# Altium PCB CHESSOBC_rev1.PcbDoc (part 1 of 4)
Units mm, origin at the board's own origin, x right, y up, seen from the top; angles counter-clockwise.
Board outline 96.01 x 90.17 mm, 6 copper layers (Top Layer, +3.3V, Layer 2, Layer 3, GND, Bottom Layer), stack 0.816 mm thick; 143 components, 230 nets, 1063 pads, 572 vias.
Unrouted connection lines stored in the file: 5.
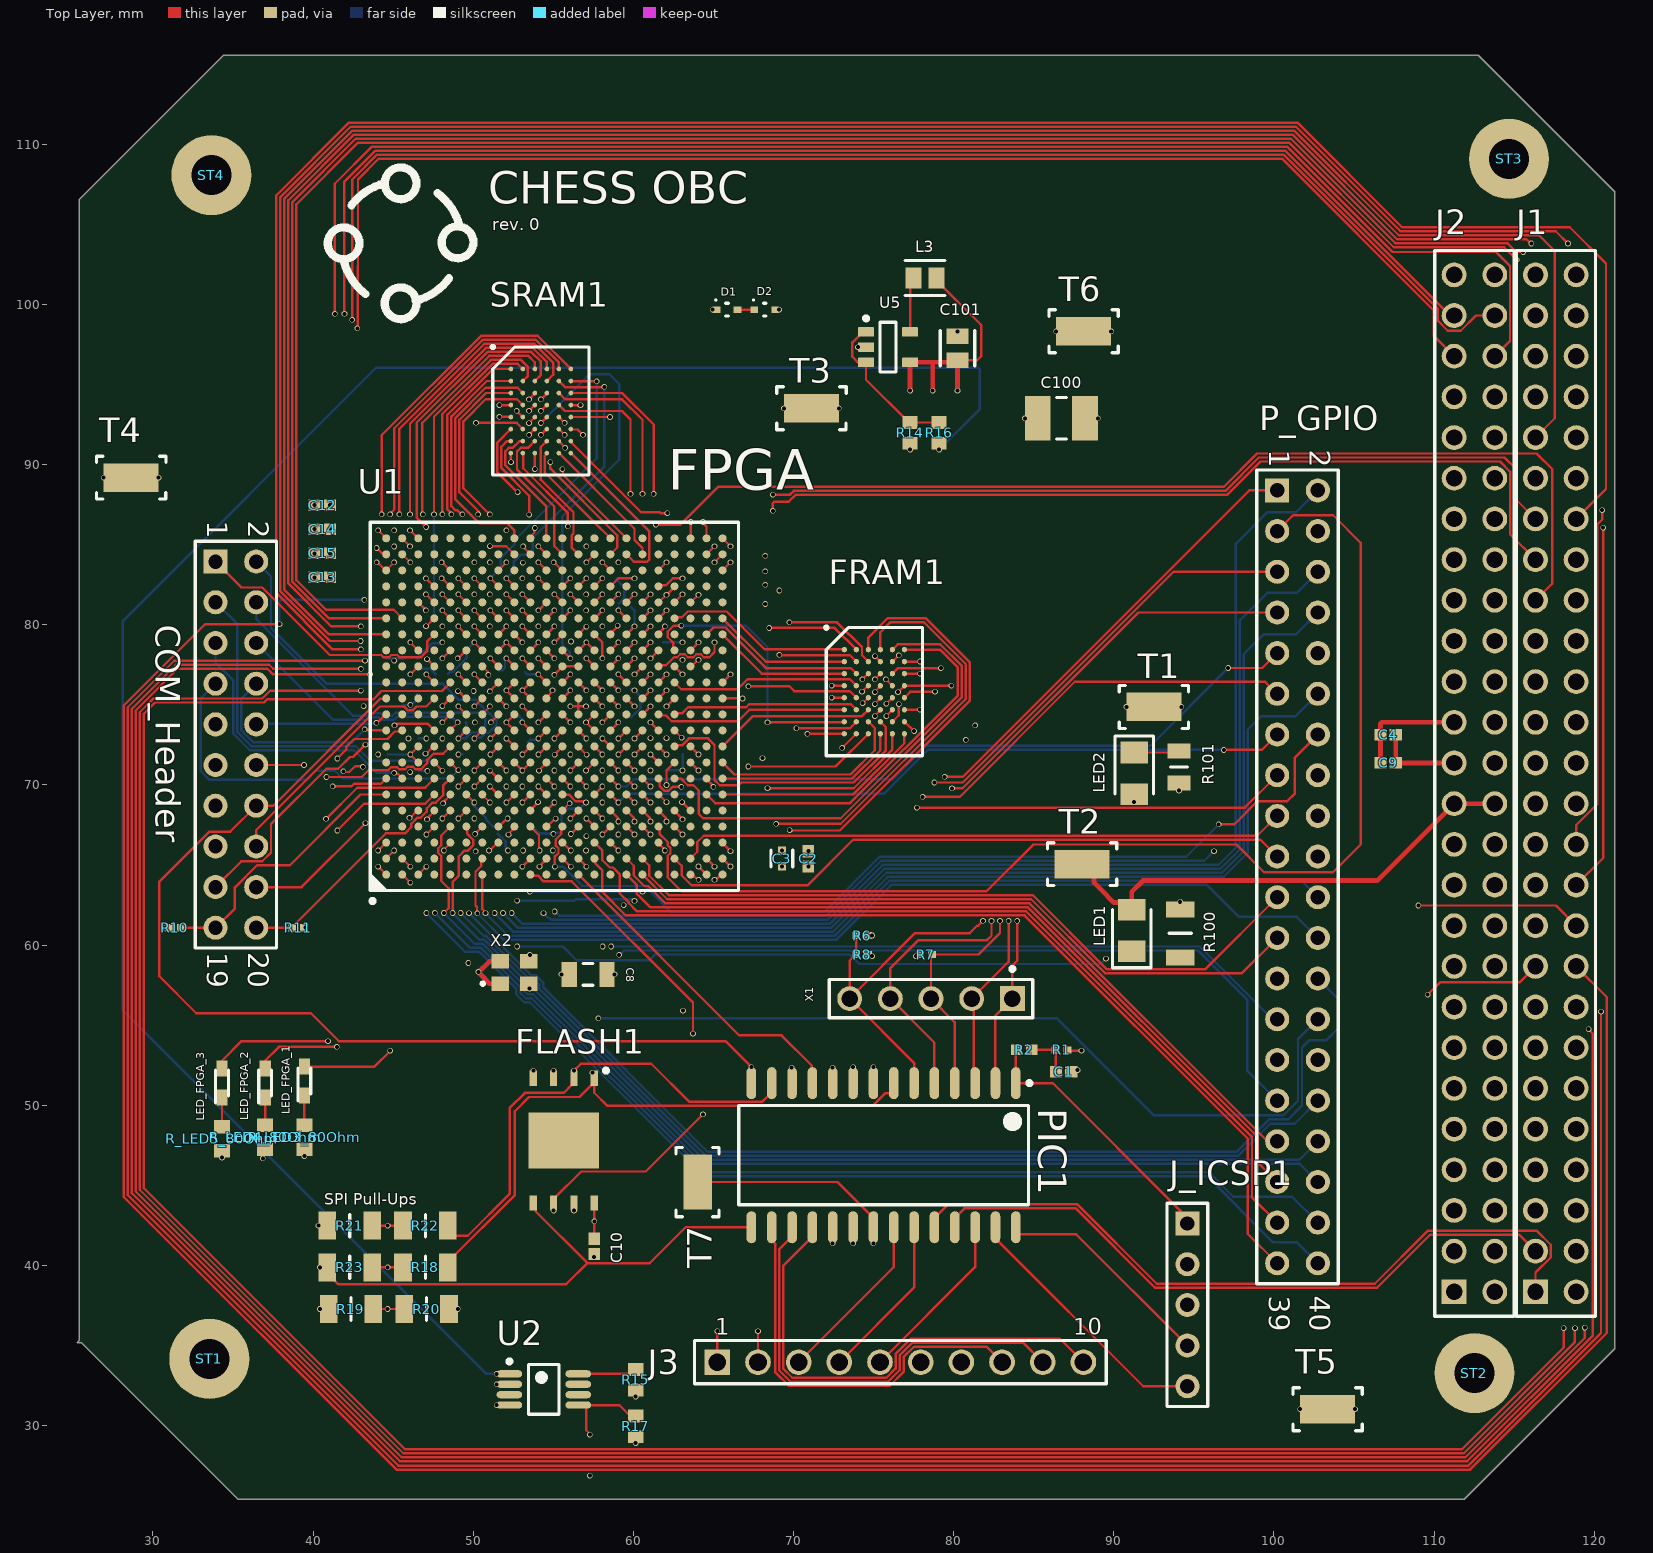
[diagram p0: Top Layer view]
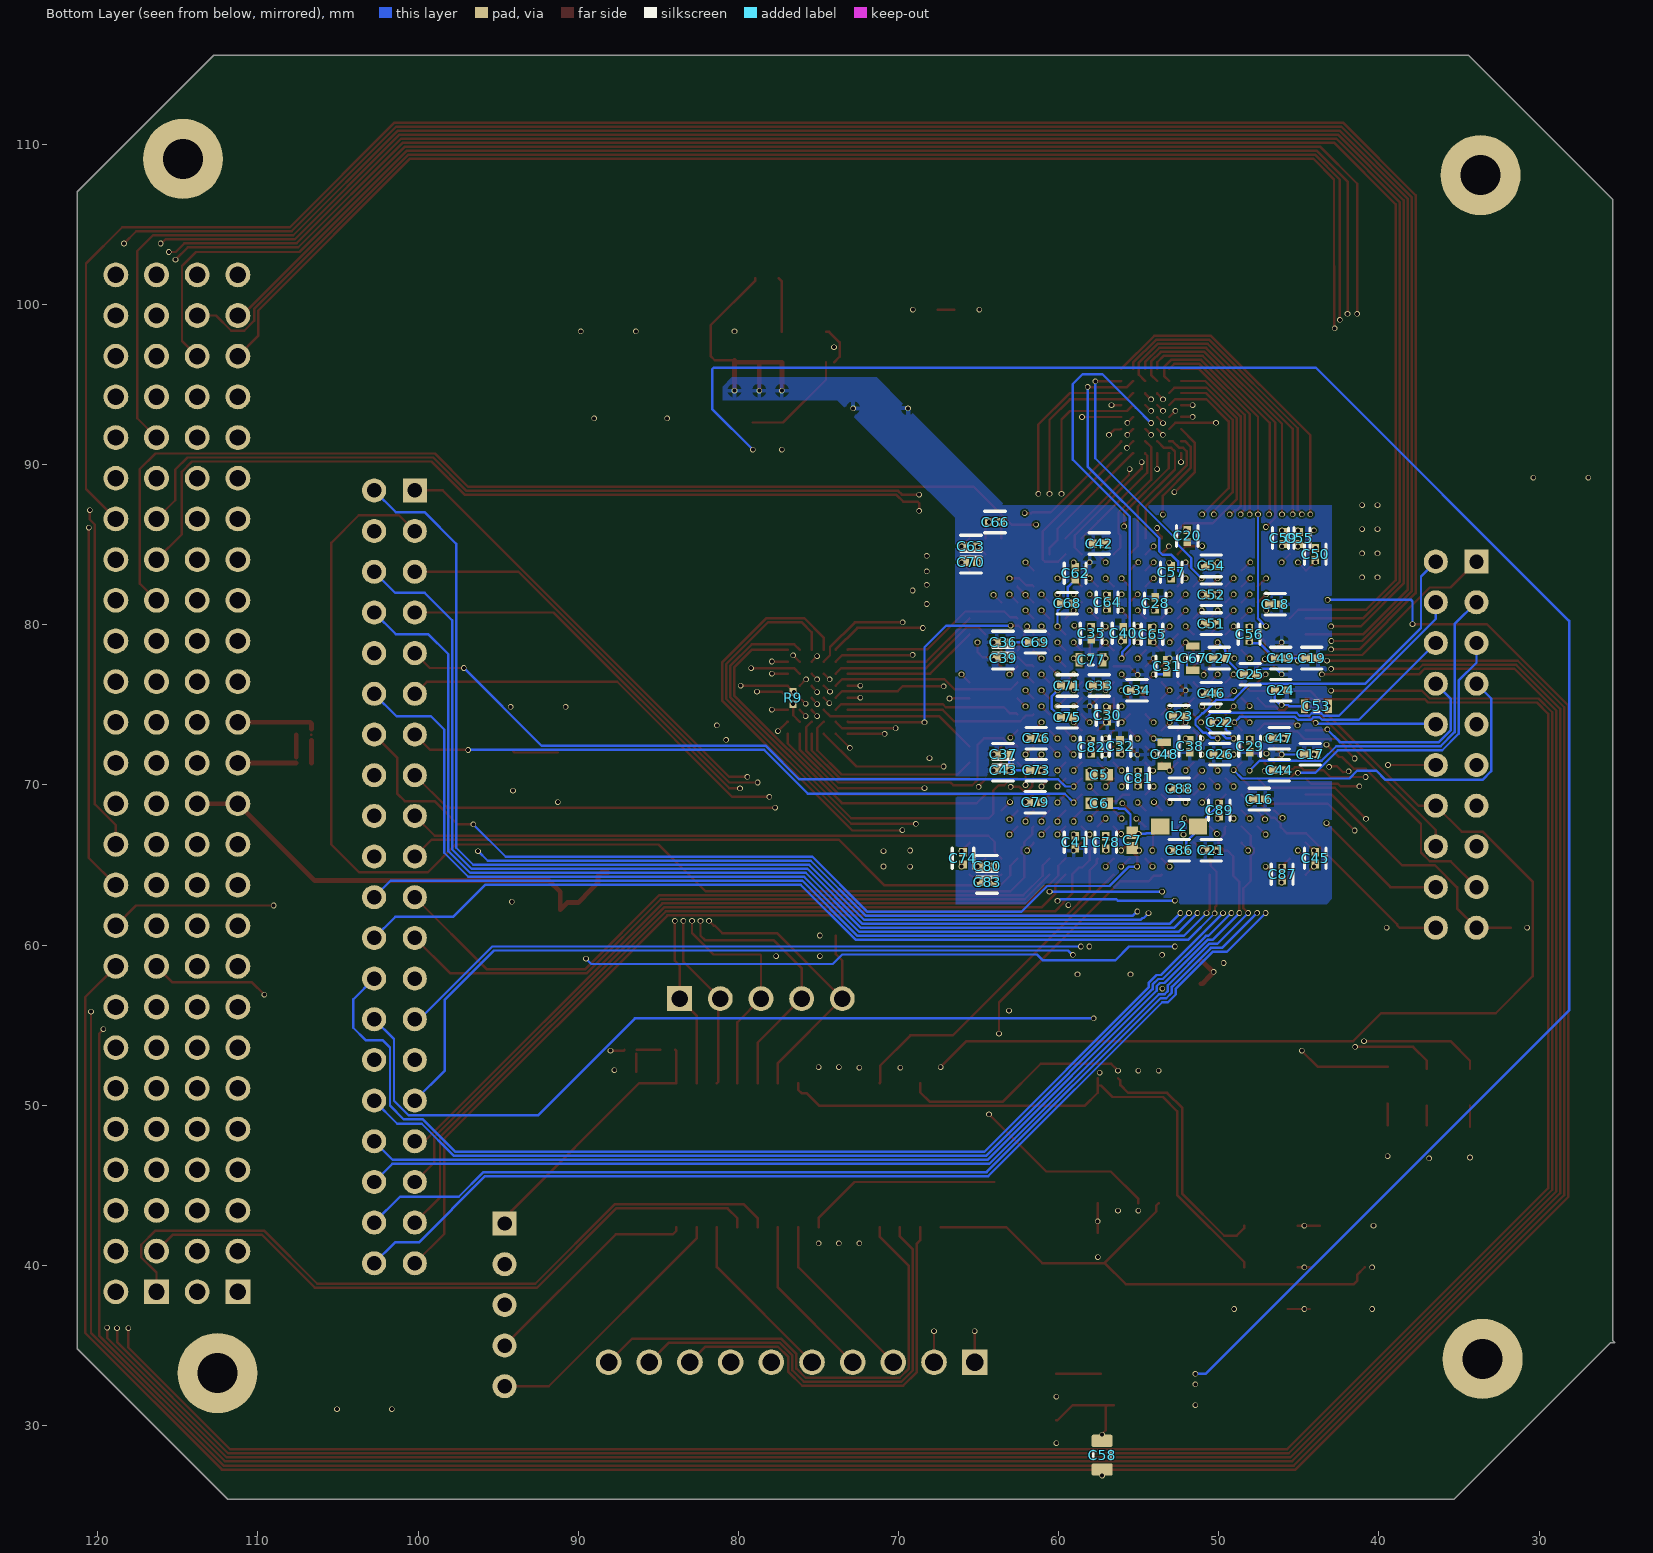
[diagram p1: Bottom Layer view, seen from below]
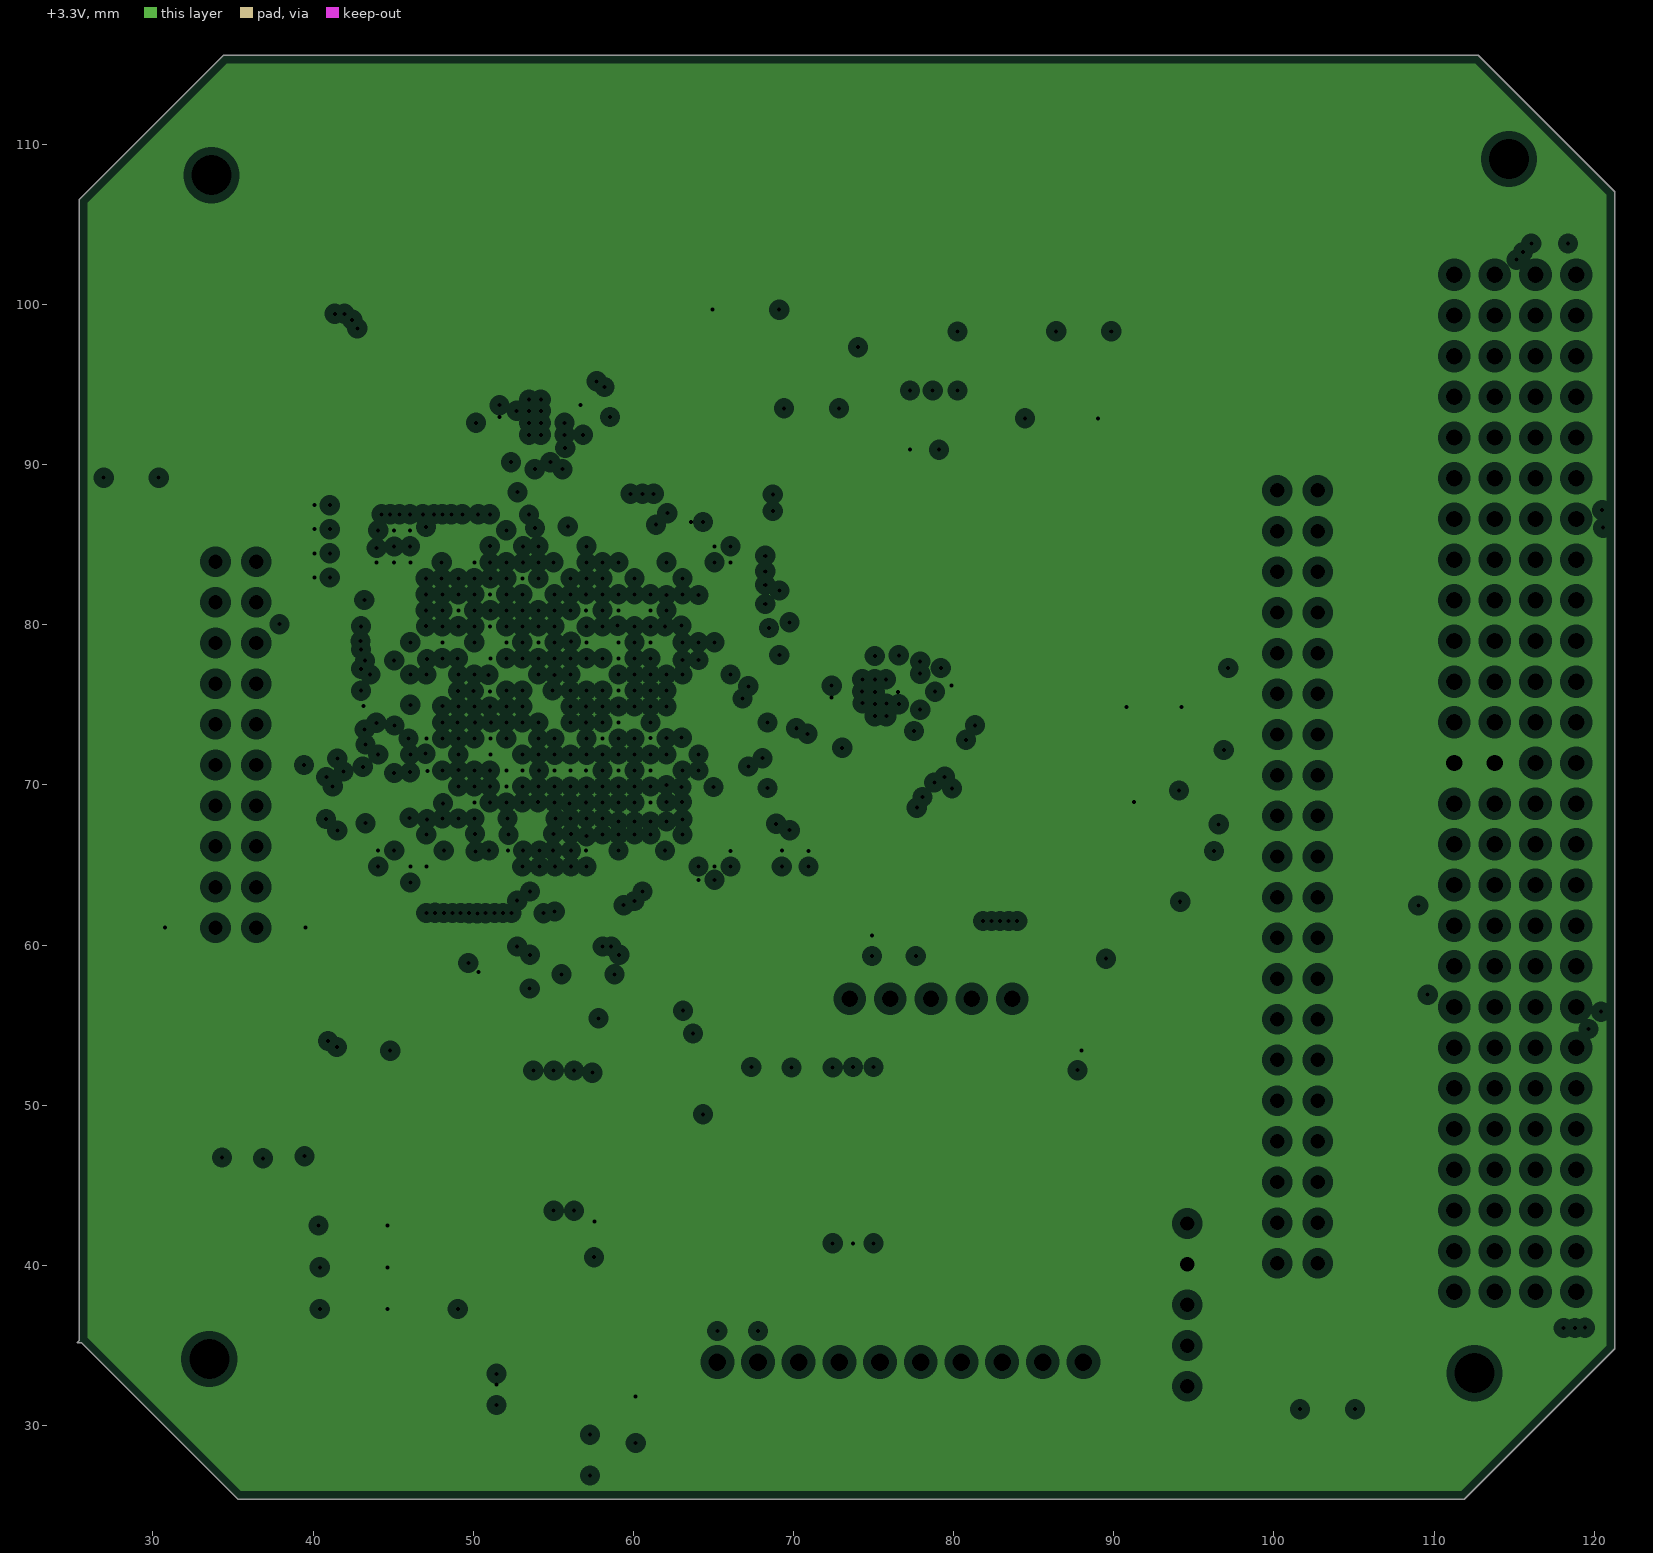
[diagram p2: +3.3V, clearances drawn from the general rule]
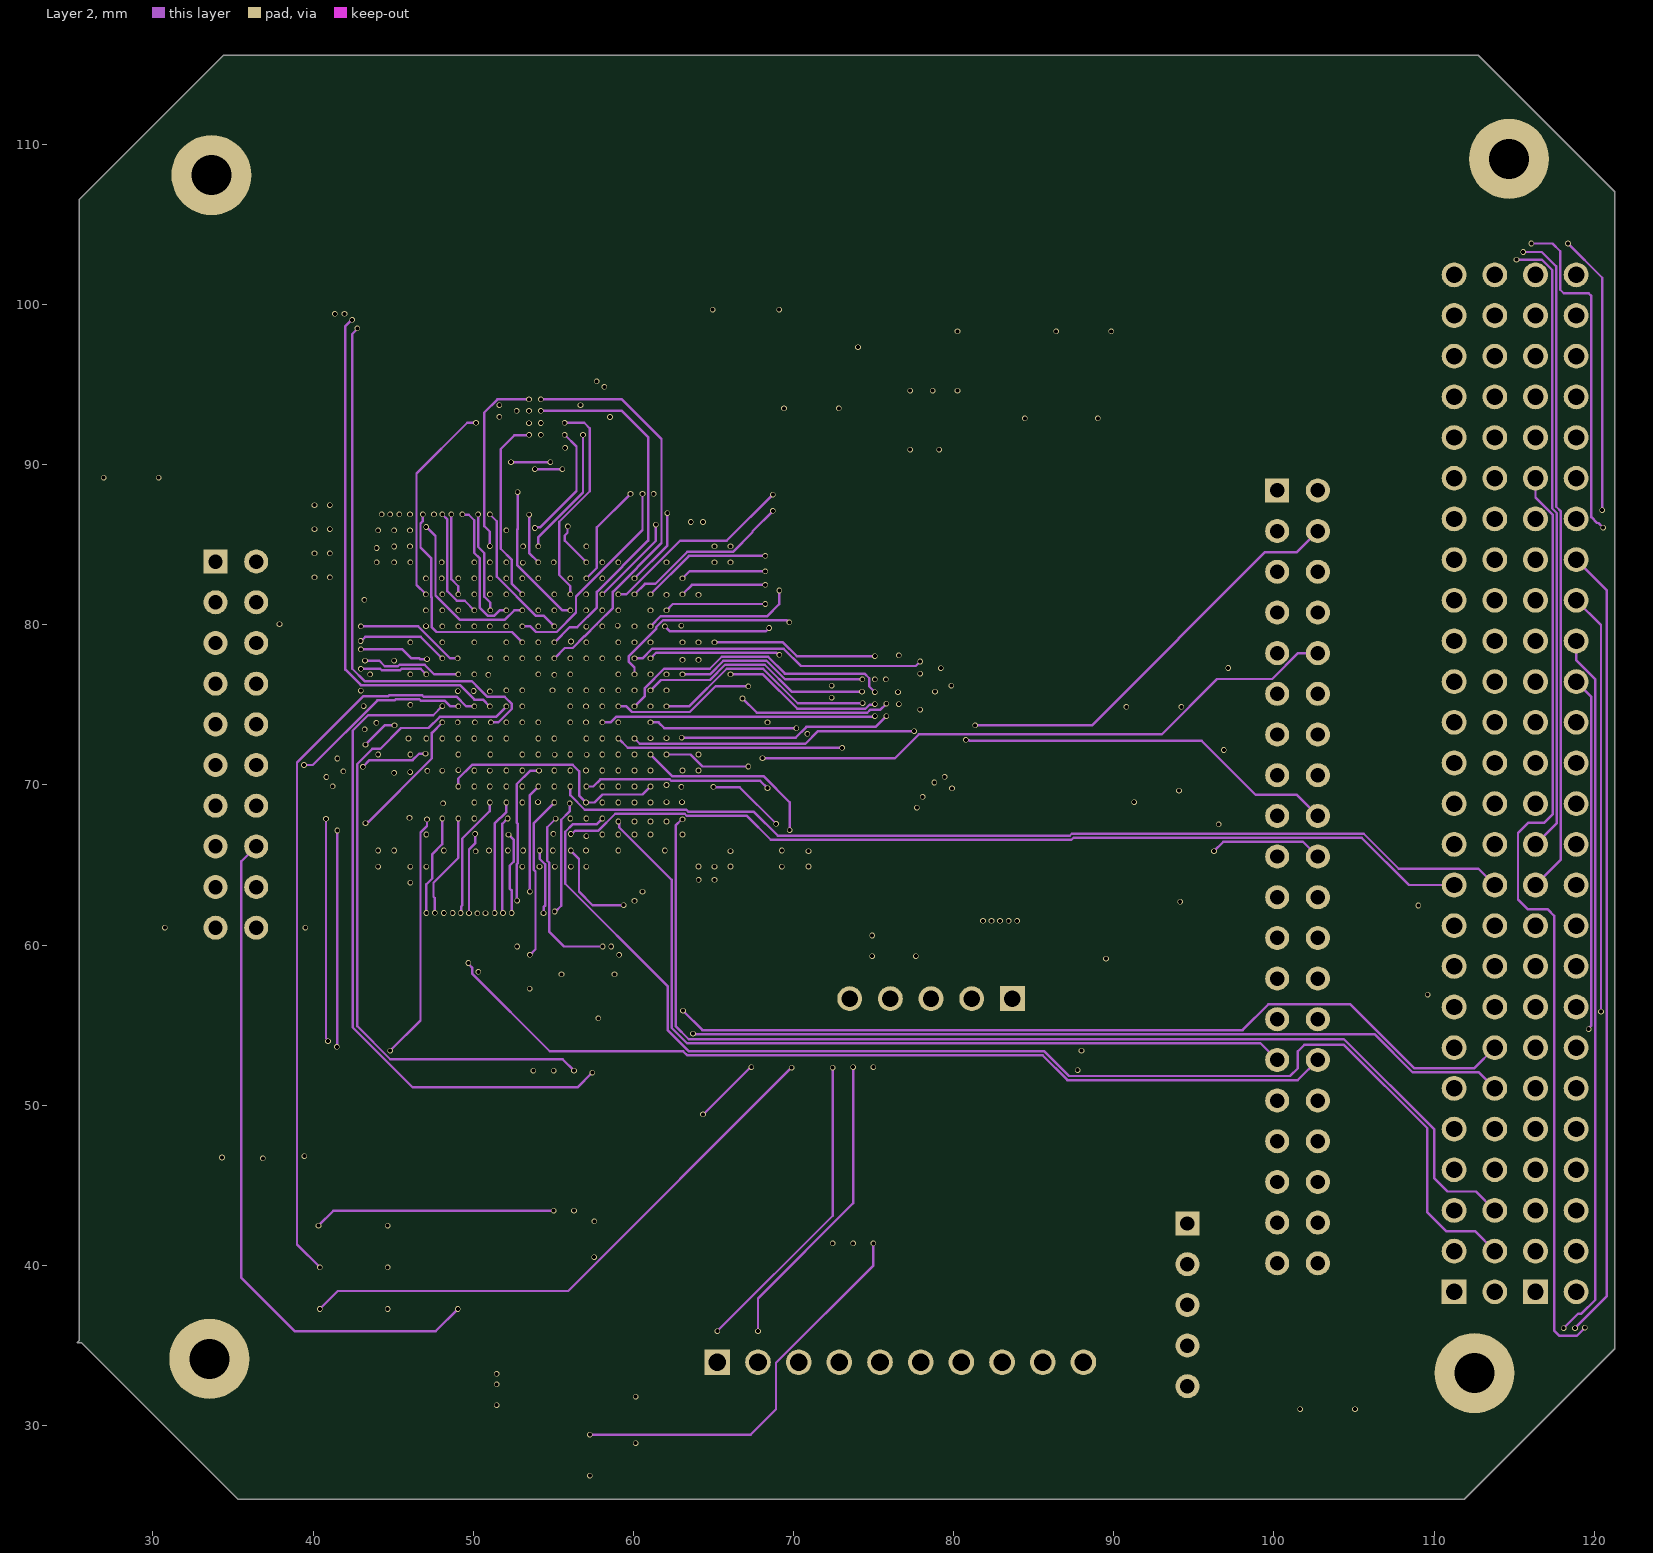
[diagram p3: Layer 2]
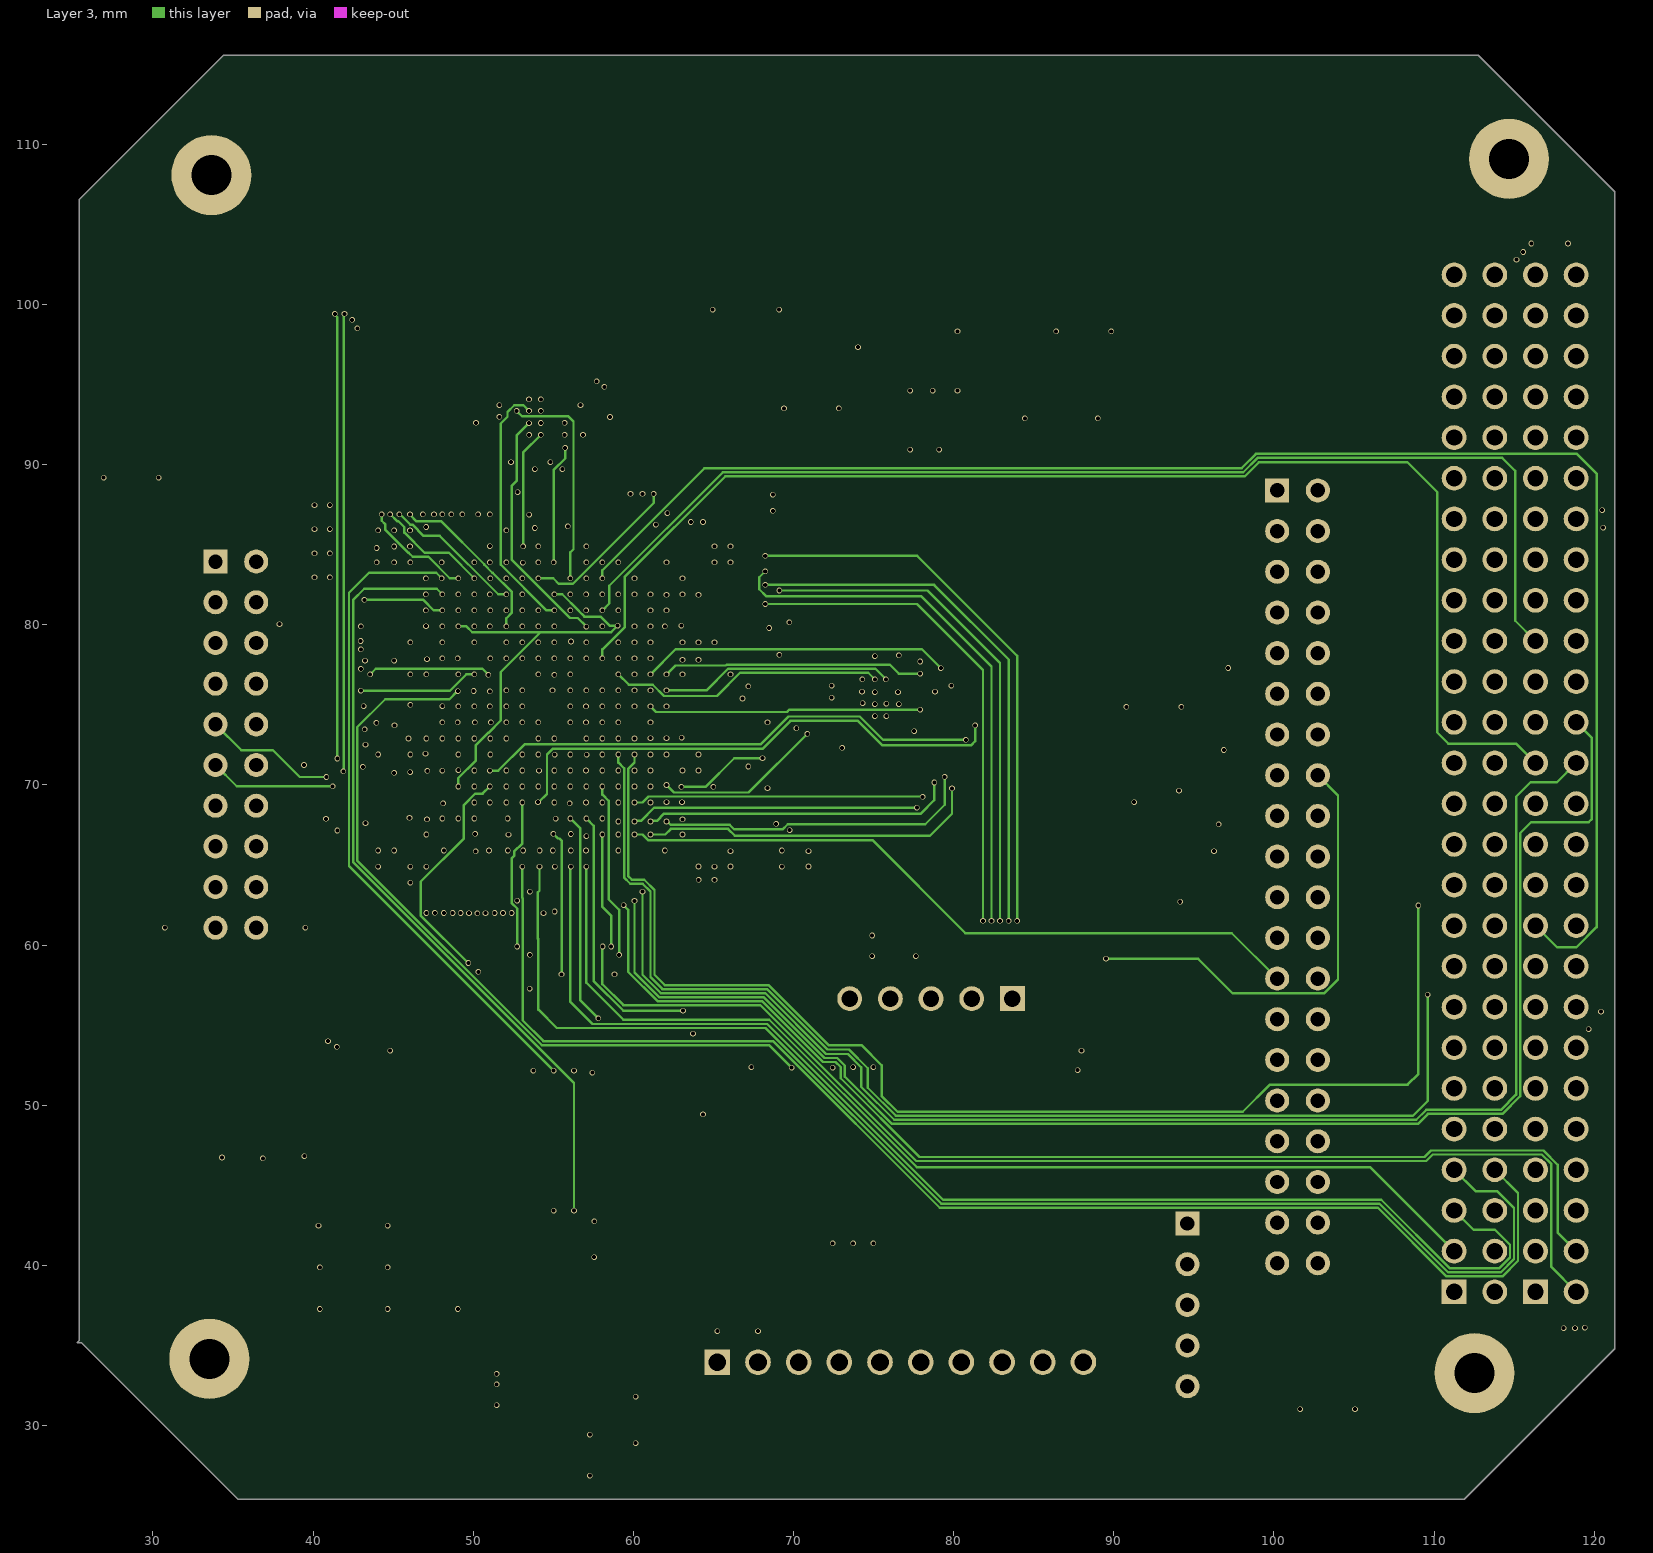
[diagram p4: Layer 3]
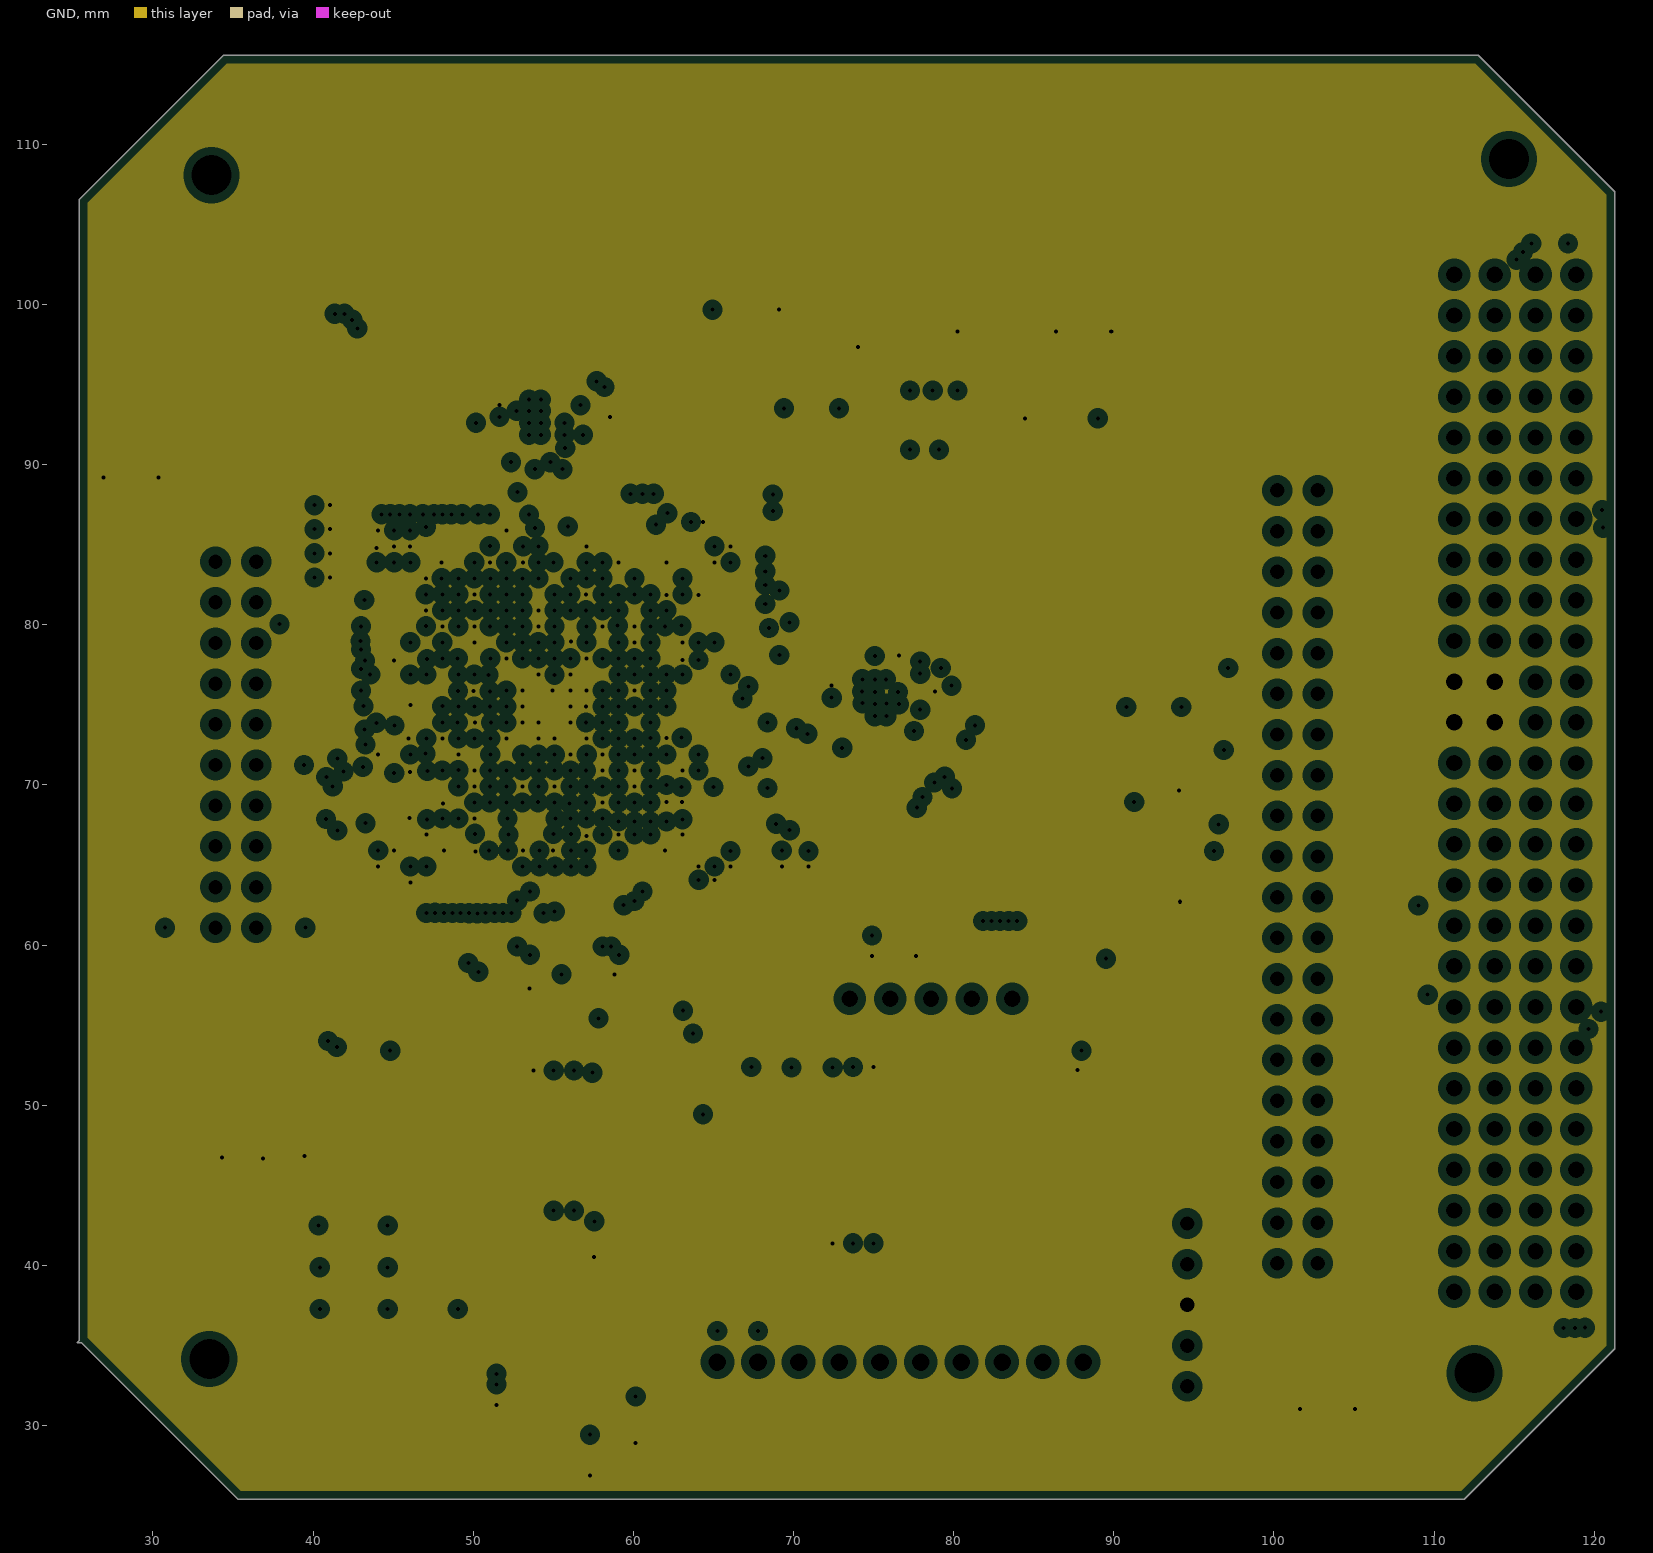
[diagram p5: GND, clearances drawn from the general rule]
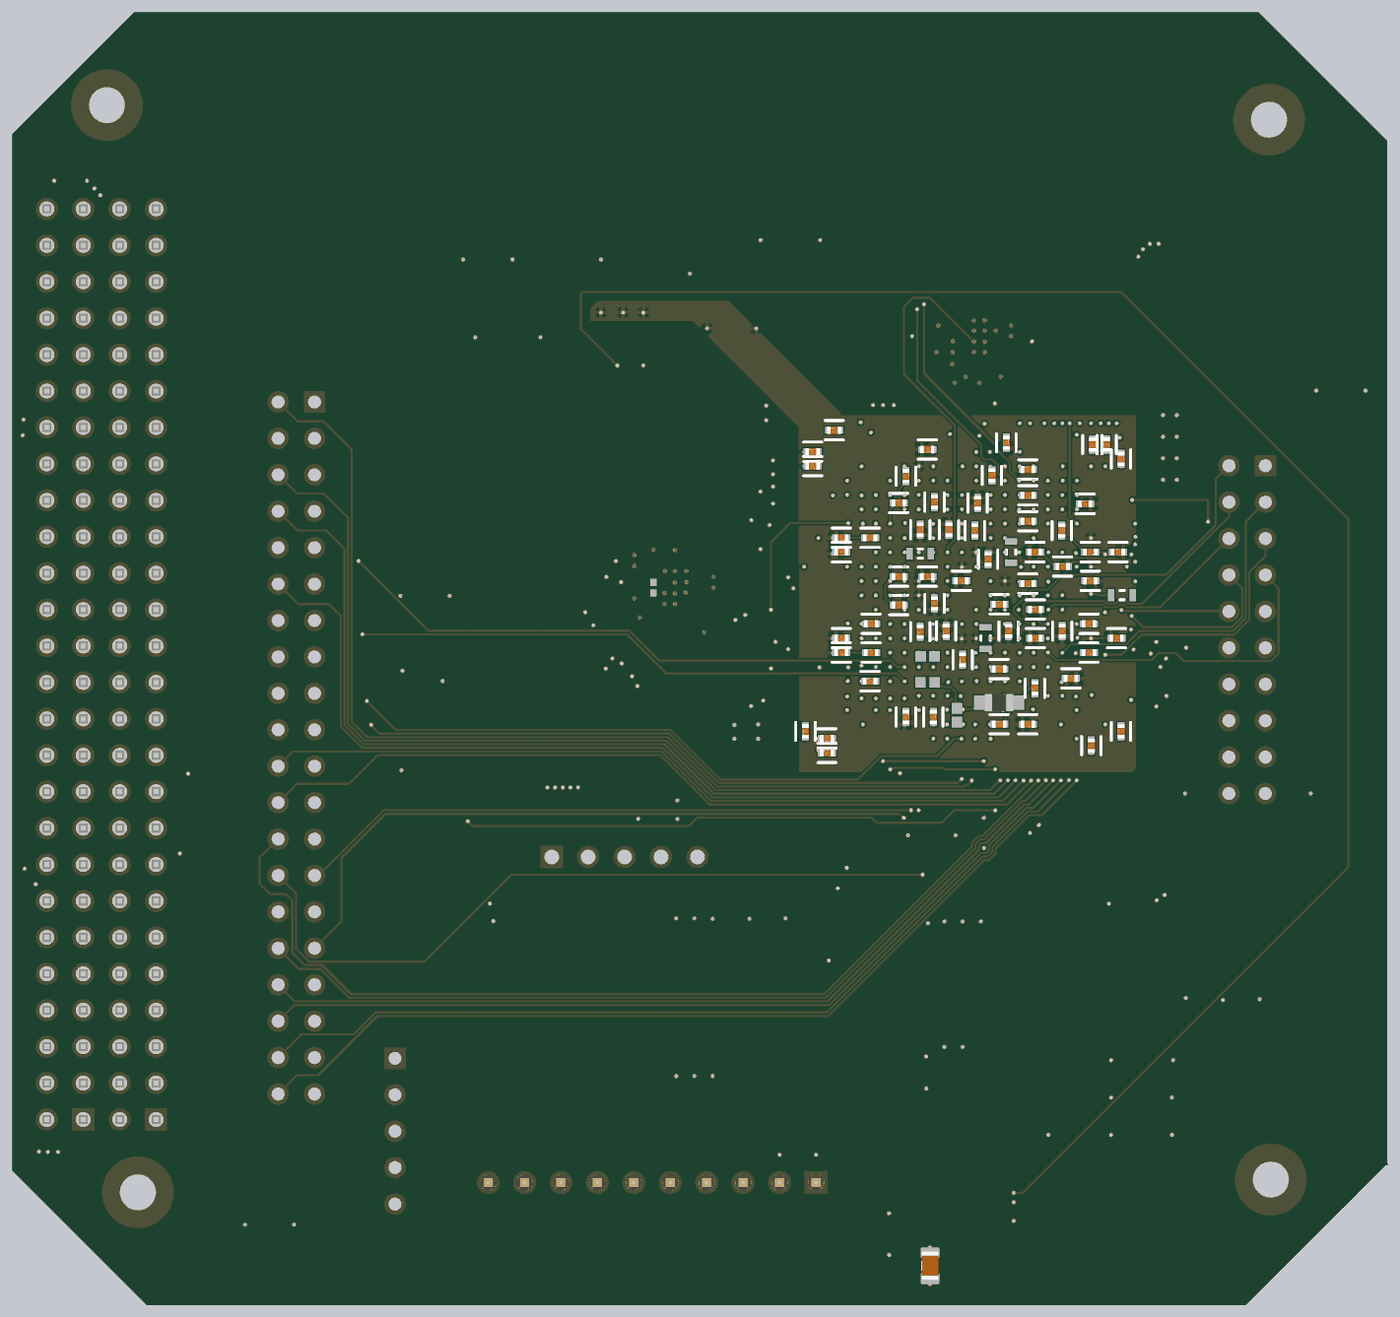
[diagram p8: 3D render of the assembled board from below, using the file's embedded part models]

## Layer stack, top to bottom
Top Solder: solder mask 0.0102, Solder Resist, Dk 3.5
Top Layer: signal copper 0.0356
Dielectric 2: prepreg 0.0711, PP-006, Dk 4.1
+3.3V: plane copper 0.035, net +3.3V
Dielectric 4: prepreg 0.0711, PP-006, Dk 4.1
Layer 2: signal copper 0.035
Dielectric 1: dielectric 0.32, FR-4, Dk 4.8
Layer 3: signal copper 0.035
Dielectric 5: prepreg 0.0711, PP-006, Dk 4.1
GND: plane copper 0.035, net GND
Dielectric 3: prepreg 0.0711, PP-006, Dk 4.1
Bottom Layer: signal copper 0.0356
Bottom Solder: solder mask 0.0102, Solder Resist, Dk 3.5

## Board outline
35.306,25.4 25.527,35.179 25.273,35.179 25.4,35.306 25.4,106.553 34.417,115.57 112.758,115.57 121.285,107.043 121.285,34.798 111.887,25.4

## Design rules (kind name [scope] priority, off if disabled: settings)
Clearance [All] p1: gap=0.1 ignorepadtopadclearanceinfootprint=TRUE except(0.075: SMDPad-SMDPad)
ComponentClearance ComponentClearance_PC [InComponent('J3') vs InComponent('J4')] p1: gap=0 collisioncheckmode=3 verticalgap=0.254 showdistances=FALSE
ComponentClearance ComponentClearance_pc104 [InComponent('J1') vs InComponent('J2')] p2: gap=0 collisioncheckmode=3 verticalgap=0 showdistances=FALSE
ComponentClearance [All] p3: gap=0.254 collisioncheckmode=3 verticalgap=0.254 showdistances=FALSE
MinimumSolderMaskSliver [All] p1: minsoldermaskwidth=0.15
PlaneClearance [All] p1: clearance=0.508
PlaneConnect PlaneConnect-FPGA [WithinRoom('FPGA')] p1: planeconnectstyle=Direct reliefexpansion=0.5 reliefentries=4 reliefconductorwidth=0.2 reliefairgap=0.2
PlaneConnect [All] p2: planeconnectstyle=Relief reliefexpansion=0.508 reliefentries=4 reliefconductorwidth=0.254 reliefairgap=0.254
PolygonConnect [All] p1: connectstyle=Relief reliefconductorwidth=0.254 reliefentries=4 polygonreliefangle="90 Angle" airgapwidth=0.254
RoomDefinition FRAM [False] p1: confinementstyle=ConfineIn formatcopy=TRUE lockcomponents=FALSE outline 70,82.5 80.25,82.5 80.25,69.75 70,69.75
RoomDefinition SRAM [False] p2: confinementstyle=ConfineIn formatcopy=TRUE lockcomponents=FALSE outline 50,98.75 58.5,98.75 58.5,88.25 50,88.25
RoomDefinition FPGA [False] p3: confinementstyle=ConfineIn formatcopy=TRUE lockcomponents=FALSE outline 42.5,87.75 68.214,87.75 68.214,62 42.5,62
RoutingVias RAM-Small-Vias [All] p1: holewidth=0.25 width=0.35 viastyle="Through Hole" minholewidth=0.25 minwidth=0.35 maxholewidth=0.25 maxwidth=0.35
SilkToSilkClearance [All] p1: silktosilkclearance=0
SilkToSolderMaskClearance [IsPad] p1: minsilkscreentomaskgap=0 clearancetoexposedcopper=TRUE
SolderMaskExpansion [All] p1: expansion=0 istentingtop=FALSE useseparateexpansions=TRUE expansionbottom=-5 istentingbottom=TRUE
Width [All] p1: maxlimit=0.3 minlimit=0.15 preferedwidth=0.15
24 further rules are at their usual default settings.

## Classes and differential pairs
component class GPIO_Headers: COM_Header LED3_FPGA LED4_FPGA LED5_FPGA LED_3V3 LED_5V P_GPIO R_LED3 R_LED3V3_180Ohm R_LED4 R_LED5 R_LED5V_75Ohm
component class FPGAPower: C3 C4 C5 C6 C7 C8 C16 C17 C18 C19 C20 C21 C22 C23 C24 C25 C26 C27 C28 C29 C30 C31 C32 C33 C34 C35 C36 C37 C38 C39 C40 C41 C42 C43 C44 C45 C46 C47 C48 C49 C50 C51 C52 C53 C54 C55 C56 C57 C59 C62 C63 C64 C65 C66 C67 C68 C69 C70 C71 C73 C74 C75 C76 C77 C78 C79 C80 C81 C82 C83 C86 C87 C88 C89 L2
component class FPGAMisc: C9 R6 R7 R8 X1 X2
component class FPGABanks: U1
component class Power: C58 C100 C101 D1 D2 L3 LED1 LED2 LED_FPGA_1 LED_FPGA_2 LED_FPGA_3 R14 R15 R16 R17 R100 R101 R_LED3_80Ohm R_LED4_80Ohm R_LED5_80Ohm ST1 ST2 ST3 ST4 T1 T2 T3 T4 T5 T6 T7 U2 U5
component class Interface: C1 C2 J1 J2 J3 J_ICSP1 PIC1 R1 R2 R3 R4 R10 R11 R18 R19 R20 R21 R22 R23
component class Memory: C10 C12 C13 C14 C15 FLASH1 FRAM1 J5 R9 Rcan S1 S4 SRAM1

## Components (designator, comment, footprint, x,y, rotation, side; value= is the part's Value field where it differs from the comment)
C1 "100nF" CAPC1005X60X30ML05T10 86.863,52.083 r180 top
C2 "100nF" CAPC1005X60X30ML05T10 70.934,65.388 r90 top
C3 "CC0402KRX5R6BB334" FP-CC0402-MFG 69.276,65.406 r270 top value="330 nF"
C4 "100nF" CAPC1005X60X30ML05T10 107.132,73.139 r0 top
C5 "100nF" CAPC1005X60X30ML05T10 57.474,70.649 r180 bottom
C6 "10nF" CAPC0402(1005)60_M 57.474,68.845 r180 bottom
C7 "100nF" CAPC1005X60X30ML05T10 55.405,66.541 r90 bottom
C8 "10uF" CAPC2013X145X20ML20 57.175,58.175 r180 top
C9 "100nF" CAPC1005X60X30ML05T10 107.132,71.374 r0 top
C10 "100nF" CAPC1005X60X30ML05T10 57.563,41.183 r90 top
C12 "100nF" CAPC1005X60X30ML05T10 40.569,87.474 r180 top
C13 "100nF" CAPC1005X60X30ML05T10 40.569,82.961 r180 top
C14 "100nF" CAPC1005X60X30ML05T10 40.569,85.97 r180 top
C15 "100nF" CAPC1005X60X30ML05T10 40.569,84.466 r180 top
C16 "10nF" FP-GRM155-0_05-IPC_C 47.474,69.116 r0 bottom
C17 "100nF" FP-GRM155-0_05-IPC_C 44.288,71.92 r180 bottom
C18 "10nF" FP-GRM155-0_05-IPC_C 46.474,81.286 r0 bottom
C19 "100nF" FP-GRM155-0_05-IPC_C 44.193,77.92 r0 bottom
C20 "10nF" FP-GRM155-0_05-IPC_C 51.974,85.548 r90 bottom
C21 "100nF" FP-GRM155-0_05-IPC_C 50.474,65.919 r180 bottom
C22 "10nF" FP-GRM155-0_05-IPC_C 49.946,73.92 r0 bottom
C23 "100nF" FP-GRM155-0_05-IPC_C 52.474,74.285 r0 bottom
C24 "10nF" FP-GRM155-0_05-IPC_C 46.12,75.92 r0 bottom
C25 "100nF" FP-GRM155-0_05-IPC_C 48.047,76.92 r0 bottom
C26 "10nF" FP-GRM155-0_05-IPC_C 49.946,71.92 r180 bottom
C27 "100nF" FP-GRM155-0_05-IPC_C 49.973,77.92 r180 bottom
C28 "10nF" FP-GRM155-0_05-IPC_C 53.973,81.347 r270 bottom
C29 "10nF" FP-GRM155-0_05-IPC_C 48.08,72.42 r90 bottom
C30 "10nF" FP-GRM155-0_05-IPC_C 56.974,74.347 r90 bottom
C31 "100nF" FP-GRM155-0_05-IPC_C 53.243,77.42 r270 bottom
C32 "10nF" FP-GRM155-0_05-IPC_C 56.17,72.42 r270 bottom
C33 "100nF" FP-GRM155-0_05-IPC_C 57.474,76.212 r180 bottom
C34 "10nF" FP-GRM155-0_05-IPC_C 55.108,75.92 r180 bottom
C35 "100nF" FP-GRM155-0_05-IPC_C 57.974,79.482 r90 bottom
C36 "10nF" FP-GRM155-0_05-IPC_C 63.474,78.92 r180 bottom
C37 "100nF" FP-GRM155-0_05-IPC_C 63.474,71.921 r180 bottom
C38 "10nF" FP-GRM155-0_05-IPC_C 51.811,72.42 r90 bottom
C39 "100nF" FP-GRM155-0_05-IPC_C 63.474,77.92 r180 bottom
C40 "10nF" FP-GRM155-0_05-IPC_C 55.974,79.482 r270 bottom
C41 "100nF" FP-GRM155-0_05-IPC_C 58.974,66.42 r90 bottom
C42 "10nF" FP-GRM155-0_05-IPC_C 57.474,85.078 r180 bottom
C43 "10nF" FP-GRM155-0_05-IPC_C 63.474,70.92 r180 bottom
C44 "10nF" FP-GRM155-0_05-IPC_C 46.215,70.92 r180 bottom
C45 "100nF" FP-GRM155-0_05-IPC_C 43.974,65.42 r270 bottom
C46 "10nF" FP-GRM155-0_05-IPC_C 50.474,75.724 r180 bottom
C47 "100nF" FP-GRM155-0_05-IPC_C 46.215,72.92 r180 bottom
C48 "1uF" CAPC1608X90X20LL10 53.415,71.92 r270 bottom
C49 "10nF" FP-GRM155-0_05-IPC_C 46.12,77.92 r180 bottom
C50 "100nF" FP-GRM155-0_05-IPC_C 43.974,84.42 r90 bottom
C51 "10nF" FP-GRM155-0_05-IPC_C 50.474,80.074 r180 bottom
C52 "100nF" FP-GRM155-0_05-IPC_C 50.474,81.879 r180 bottom
C53 "1uF" CAPC1608X90X20LL10 43.904,74.92 r180 bottom
C54 "100nF" FP-GRM155-0_05-IPC_C 50.474,83.683 r0 bottom
C55 "10nF" FP-GRM155-0_05-IPC_C 44.974,85.42 r270 bottom
C56 "100nF" FP-GRM155-0_05-IPC_C 48.108,79.42 r90 bottom
C57 "10nF" FP-GRM155-0_05-IPC_C 52.973,83.273 r90 bottom
C58 "Capacitor 22µF +/-40% 16V 0805" CAPC0805(2012)145_L 57.287,28.159 r90 bottom value=22µF
C59 "100nF" FP-GRM155-0_05-IPC_C 45.975,85.421 r270 bottom
C62 "10nF" FP-GRM155-0_05-IPC_C 58.973,83.213 r90 bottom
C63 "100nF" FP-GRM155-0_05-IPC_C 65.474,84.92 r0 bottom
C64 "10nF" FP-GRM155-0_05-IPC_C 56.974,81.409 r90 bottom
C65 "100nF" FP-GRM155-0_05-IPC_C 54.17,79.42 r90 bottom
C66 "10nF" FP-GRM155-0_05-IPC_C 63.973,86.42 r0 bottom
C67 "1uF" CAPC1608X90X20LL10 51.639,77.92 r90 bottom
C68 "10nF" FP-GRM155-0_05-IPC_C 59.474,81.347 r0 bottom
C69 "100nF" FP-GRM155-0_05-IPC_C 61.474,78.919 r0 bottom
C70 "10nF" FP-GRM155-0_05-IPC_C 65.474,83.92 r180 bottom
C71 "100nF" FP-GRM155-0_05-IPC_C 59.474,76.212 r0 bottom
C73 "10nF" FP-GRM155-0_05-IPC_C 61.401,70.92 r0 bottom
C74 "100nF" FP-GRM155-0_05-IPC_C 65.974,65.42 r270 bottom
C75 "10nF" FP-GRM155-0_05-IPC_C 59.474,74.23 r0 bottom
C76 "100nF" FP-GRM155-0_05-IPC_C 61.401,72.92 r0 bottom
C77 "1uF" CAPC1608X90X20LL10 57.974,77.816 r0 bottom
C78 "10nF" FP-GRM155-0_05-IPC_C 57.06,66.42 r90 bottom
C79 "10nF" FP-GRM155-0_05-IPC_C 61.474,68.92 r0 bottom
C80 "100nF" FP-GRM155-0_05-IPC_C 64.474,64.92 r180 bottom
C81 "10nF" FP-GRM155-0_05-IPC_C 55.02,70.42 r270 bottom
C82 "100nF" FP-GRM155-0_05-IPC_C 57.974,72.365 r270 bottom
C83 "10nF" FP-GRM155-0_05-IPC_C 64.474,63.92 r0 bottom
C86 "10nF" FP-GRM155-0_05-IPC_C 52.474,65.922 r0 bottom
C87 "100nF" FP-GRM155-0_05-IPC_C 46.05,64.425 r270 bottom
C88 "10nF" FP-GRM155-0_05-IPC_C 52.474,69.766 r0 bottom
C89 "100nF" FP-GRM155-0_05-IPC_C 49.973,68.419 r270 bottom
C100 "CAP 4.7uF 25V 1210(3225)" CAPC1210(3225)220_M 86.728,92.899 r0 top value=4.7uF
C101 "C0805C106K8PACTU" FP-C0805C-DG-MFG 80.24,97.273 r90 top value=10uF
COM_Header "Header 10X2" HDR2X10 33.909,83.947 r270 top
D1 "T3V3S5" ONSC-SOD-523-2-502-01_V 65.847,99.681 r0 top
D2 "T3V3S5" ONSC-SOD-523-2-502-01_V 68.207,99.681 r0 top
FLASH1 "TC58CVG0S3HRAIJ" SON127P800X600X80-9N-D 55.658,47.791 r270 top
FRAM1 "FM22LD16-55-BG" BGA48C75P6X8_600X800X120 75.051,75.825 r0 top locked
J1 "ESQ-126-23-T-D" SMTC-ESQ-126-23-X-D 116.332,38.354 r90 top
J2 "ESQ-126-23-T-D" SMTC-ESQ-126-23-X-D 111.252,38.354 r90 top
J3 "61301011121" 61301011121 76.674,33.959 r0 top
J_ICSP1 "" HDR1X5 94.596,42.617 r270 top
L2 "445-6761-2-ND 6.8uH" SMD-0805 52.474,67.42 r180 bottom
L3 "LQM21PN2R2NGCD" FP-LQM21PH_G0-IPC_C 78.214,101.656 r0 top
LED1 "RPG1102W-660-TR" LEDC3015X190N 91.125,60.911 r90 top
LED2 "RPG1102W-660-TR" LEDC3015X190N 91.275,70.731 r270 top
LED_FPGA_1 "SMLD12BN1WT86" LEDM168X65N 39.46,51.512 r90 top
LED_FPGA_2 "SMLD12BN1WT86" LEDM168X65N 37.009,51.383 r90 top
LED_FPGA_3 "SMLD12BN1WT86" LEDM168X65N 34.313,51.384 r90 top
P_GPIO "Header 20X2" HDR2X20 100.203,88.392 r270 top
PIC1 "PIC18F2520-I/SO" SOIC-SO28_L 75.626,46.883 r270 top
R1 "10k" RESC1005X40X25LL05T10 86.738,53.459 r0 top
R2 "220R" RESC1005X40X25ML05T10 84.409,53.459 r180 top
R6 "NC" RESC1005X40X25LL05T10 74.284,60.599 r0 top
R7 "10k" RESC1005X40X25LL05T10 78.262,59.413 r0 top
R8 "4k7" RESC1005X40X25LL05T10 74.284,59.413 r180 top
R9 "10k" RESC1005X40X25LL05T10 76.581,75.438 r90 bottom
R10 "10k" RESC1005X40X25LL05T10 31.377,61.087 r180 top
R11 "10k" RESC1005X40X25LL05T10 39.069,61.087 r0 top
R14 "CRCW06030000Z0EA" RESC1609X50X30NL8T20 77.281,91.984 r90 top
R15 "CRCW06030000Z0EA" RESC1609X50X30NL8T20 60.149,32.86 r90 top
R16 "CRCW06030000Z0EA" RESC1609X50X30NL8T20 79.09,91.984 r270 top
R17 "CRCW06030000Z0EA" RESC1609X50X30NL8T20 60.149,29.956 r90 top
R18 "CHP1206AFX-4701ELF" RESC3116X65N#1 47.014,39.883 r180 top
R19 "CHP1206AFX-4701ELF" RESC3116X65N#1 42.369,37.279 r0 top
R20 "CHP1206AFX-4701ELF" RESC3116X65N#1 47.091,37.279 r180 top
R21 "CHP1206AFX-4701ELF" RESC3116X65N#1 42.291,42.487 r0 top
R22 "CHP1206AFX-4701ELF" RESC3116X65N#1 47.014,42.487 r180 top
R23 "CHP1206AFX-4701ELF" RESC3116X65N#1 42.291,39.883 r0 top
R100 "RC1206JR-07180RL" RESC3116X65N#2 94.15,60.739 r90 top
R101 "RN73H2ATTD75R0B25" RESC2012X60N 94.075,71.125 r270 top
R_LED3_80Ohm "RCS060382R0FKEA" RESC1608X50N 39.46,47.998 r270 top
R_LED4_80Ohm "RCS060382R0FKEA" RESC1608X50N 37.009,48.004 r270 top
R_LED5_80Ohm "RCS060382R0FKEA" RESC1608X50N 34.313,47.917 r270 top
SRAM1 "CY62167GE30-45BV1XI" BGA48C75P6X8_600X800X100 54.223,93.351 r0 top locked
ST1 "PTH-M2D5X5" PTH-M2D5X5 33.528,34.163 r0 top
ST2 "PTH-M2D5X5" PTH-M2D5X5 112.522,33.274 r0 top
ST3 "PTH-M2D5X5" PTH-M2D5X5 114.681,109.093 r0 top
ST4 "PTH-M2D5X5" PTH-M2D5X5 33.655,108.077 r0 top
T1 "5015" FP-5015-MFG 92.5,74.875 r0 top
T2 "5015" FP-5015-MFG 88.02,65.055 r0 top
T3 "5015" FP-5015-MFG 71.123,93.524 r0 top
T4 "5015" FP-5015-MFG 28.644,89.189 r0 top
T5 "5015" FP-5015-MFG 103.347,31.02 r0 top
T6 "5015" FP-5015-MFG 88.116,98.33 r0 top
T7 "5015" FP-5015-MFG 64.008,45.207 r90 top
U1 "M1A3P600-FG484" FG484 55.07,74.906 r90 top locked
U2 "LT6105IMS8#PBF" LT-MS8-8_N 54.411,32.255 r0 top
U5 "LM3671MF-3.3/NOPB" DBV0005A_N 75.906,97.341 r0 top
X1 "77311-462K05LF" FCI-77311-5_V 78.589,56.661 r180 top
X2 "ECS-2033-320-AU" OSC_ECS-2033-320-AU 52.578,58.293 r0 top

## Footprints (in the part's own frame and the unit in brackets; to place one, negate y for a bottom-side part, rotate by r counter-clockwise, add the part's x,y. Pads: shape width x height; smd on the part's side, far side on the other; paste and mask are expansions set on the pad)
61301011121 [mm] "Pin Header, pitch 2.54 mm, THT, Vertical, single row, 10p"
  rect 1.6x1.6 hole 1.1: 1(-11.43,0)
  round 1.6 hole 1.1: 2(-8.89,0) 3(-6.35,0) 4(-3.81,0) 5(-1.27,0) 6(1.27,0) 7(3.81,0) 8(6.35,0) 9(8.89,0) 10(11.43,0)
  silkscreen extent -12.85,-1.34 12.85,1.34, body extent -12.7,-1.27 12.7,1.27, height 8.57
BGA48C75P6X8_600X800X100 [mm]
  round 0.29 smd: A1(-1.875,2.625) A2(-1.125,2.625) A3(-0.375,2.625) A4(0.375,2.625) A5(1.125,2.625) A6(1.875,2.625) B1(-1.875,1.875) B2(-1.125,1.875) B3(-0.375,1.875) B4(0.375,1.875) B5(1.125,1.875) B6(1.875,1.875) C1(-1.875,1.125) C2(-1.125,1.125) C3(-0.375,1.125) C4(0.375,1.125) C5(1.125,1.125) C6(1.875,1.125) D1(-1.875,0.375) D2(-1.125,0.375) D3(-0.375,0.375) D4(0.375,0.375) D5(1.125,0.375) D6(1.875,0.375) E1(-1.875,-0.375) E2(-1.125,-0.375) E3(-0.375,-0.375) E4(0.375,-0.375) E5(1.125,-0.375) E6(1.875,-0.375) F1(-1.875,-1.125) F2(-1.125,-1.125) F3(-0.375,-1.125) F4(0.375,-1.125) F5(1.125,-1.125) F6(1.875,-1.125) G1(-1.875,-1.875) G2(-1.125,-1.875) G3(-0.375,-1.875) G4(0.375,-1.875) G5(1.125,-1.875) G6(1.875,-1.875) H1(-1.875,-2.625) H2(-1.125,-2.625) H3(-0.375,-2.625) H4(0.375,-2.625) H5(1.125,-2.625) H6(1.875,-2.625)
  silkscreen extent -3.1,-4 3,4.1, body extent -3,-4 3,4, height 1
BGA48C75P6X8_600X800X120 [mm]
  round 0.33 smd: A1(-1.875,2.625) A2(-1.125,2.625) A3(-0.375,2.625) A4(0.375,2.625) A5(1.125,2.625) A6(1.875,2.625) B1(-1.875,1.875) B2(-1.125,1.875) B3(-0.375,1.875) B4(0.375,1.875) B5(1.125,1.875) B6(1.875,1.875) C1(-1.875,1.125) C2(-1.125,1.125) C3(-0.375,1.125) C4(0.375,1.125) C5(1.125,1.125) C6(1.875,1.125) D1(-1.875,0.375) D2(-1.125,0.375) D3(-0.375,0.375) D4(0.375,0.375) D5(1.125,0.375) D6(1.875,0.375) E1(-1.875,-0.375) E2(-1.125,-0.375) E3(-0.375,-0.375) E4(0.375,-0.375) E5(1.125,-0.375) E6(1.875,-0.375) F1(-1.875,-1.125) F2(-1.125,-1.125) F3(-0.375,-1.125) F4(0.375,-1.125) F5(1.125,-1.125) F6(1.875,-1.125) G1(-1.875,-1.875) G2(-1.125,-1.875) G3(-0.375,-1.875) G4(0.375,-1.875) G5(1.125,-1.875) G6(1.875,-1.875) H1(-1.875,-2.625) H2(-1.125,-2.625) H3(-0.375,-2.625) H4(0.375,-2.625) H5(1.125,-2.625) H6(1.875,-2.625)
  silkscreen extent -3.1,-4 3,4.1, body extent -3,-4 3,4, height 1.2
CAPC0402(1005)60_M [mm] "Chip Capacitor, Body 1.0x0.5mm, Height 0.6mm, IPC Low Density"
  rect 0.72x0.72 smd: 1(-0.5,0) 2(0.5,0)
  body extent -0.55,-0.3 0.55,0.3, height 0.6
CAPC0805(2012)145_L [mm] "Chip Capacitor, Body 2.0x1.2mm, Height 1.45mm, IPC High Density"
  rrect25% 0.76x1.3 smd: 1(-0.9,0) 2(0.89,0)
  silkscreen extent -0.3,-0.55 0.3,0.55, body extent -1,-0.6 1,0.6, height 1.45
CAPC1005X60X30ML05T10 [mm] "Chip Capacitor, 2-Leads, Body 1.00x0.50mm, IPC Low Density"
  rect 0.76x0.72 smd: 1(-0.48,0) 2(0.48,0)
  body extent -0.53,-0.28 0.53,0.27, height 0.6
CAPC1210(3225)220_M [mm] "Chip Capacitor, Body 3.2x2.5mm, Height 2.2mm, IPC Low Density"
  rect 1.6x2.8 smd: 1(-1.475,0) 2(1.475,0)
  silkscreen extent -0.3,-1.3 0.3,1.3, body extent -1.7,-1.35 1.7,1.35, height 2.2
CAPC1608X90X20LL10 [mm] "Chip Capacitor, 2-Leads, Body 1.70x0.90mm, IPC High Density"
  rect 0.45x0.85 smd: 1(-0.75,0) 2(0.75,0)
  silkscreen extent -0.15,-0.33 0.15,0.32, body extent -0.85,-0.45 0.85,0.45, height 0.9
CAPC2013X145X20ML20 [mm] "Chip Capacitor, 2-Leads, Body 2.20x1.45mm, IPC Low Density"
  rect 0.95x1.55 smd: 1(-1.175,0) 2(1.175,0)
  silkscreen extent -0.3,-0.67 0.3,0.67, body extent -1.1,-0.72 1.1,0.72, height 1.45
DBV0005A_N [mm] "SOT23, 5-Leads, Body 3.05x1.75mm, Pitch 0.95mm, IPC Medium Density"
  rrect17% 1x0.6 smd: 1(-1.375,0.95) 2(-1.375,0) 3(-1.375,-0.95) 4(1.375,-0.95) 5(1.375,0.95)
  silkscreen extent -1.5,-1.55 0.5,1.92, body extent -1.42,-1.46 1.42,1.46, height 1.08
FCI-77311-5_V [mm] "THD, 5-Leads, Body 12.7x2.4mm, Pitch 2.54mm"
  rect 1.55x1.55 hole 1.02: 1(-5.08,0)
  round 1.55 hole 1.02: 2(-2.54,0) 3(0,0) 4(2.54,0) 5(5.08,0)
  silkscreen extent -6.35,-1.97 6.35,1.2, body extent -6.35,-1.2 6.35,1.2, height 16.24
FG484 [mm] "BGA, 484-Leads, Body 23x23mm, Pitch 1mm"
  round 0.5 smd: A1(-10.5,10.5) A2(-9.5,10.5) A3(-8.5,10.5) A4(-7.5,10.5) A5(-6.5,10.5) A6(-5.5,10.5) A7(-4.5,10.5) A8(-3.5,10.5) A9(-2.5,10.5) A10(-1.5,10.5) A11(-0.5,10.5) A12(0.5,10.5) A13(1.5,10.5) A14(2.5,10.5) A15(3.5,10.5) A16(4.5,10.5) A17(5.5,10.5) A18(6.5,10.5) A19(7.5,10.5) A20(8.5,10.5) A21(9.5,10.5) A22(10.5,10.5) AA1(-10.5,-9.5) AA2(-9.5,-9.5) AA3(-8.5,-9.5) AA4(-7.5,-9.5) AA5(-6.5,-9.5) AA6(-5.5,-9.5) AA7(-4.5,-9.5) AA8(-3.5,-9.5) AA9(-2.5,-9.5) AA10(-1.5,-9.5) AA11(-0.5,-9.5) AA12(0.5,-9.5) AA13(1.5,-9.5) AA14(2.5,-9.5) AA15(3.5,-9.5) AA16(4.5,-9.5) AA17(5.5,-9.5) AA18(6.5,-9.5) AA19(7.5,-9.5) AA20(8.5,-9.5) AA21(9.5,-9.5) AA22(10.5,-9.5) AB1(-10.5,-10.5) AB2(-9.5,-10.5) AB3(-8.5,-10.5) AB4(-7.5,-10.5) AB5(-6.5,-10.5) AB6(-5.5,-10.5) AB7(-4.5,-10.5) AB8(-3.5,-10.5) AB9(-2.5,-10.5) AB10(-1.5,-10.5) AB11(-0.5,-10.5) AB12(0.5,-10.5) AB13(1.5,-10.5) AB14(2.5,-10.5) AB15(3.5,-10.5) AB16(4.5,-10.5) AB17(5.5,-10.5) AB18(6.5,-10.5) AB19(7.5,-10.5) AB20(8.5,-10.5) AB21(9.5,-10.5) AB22(10.5,-10.5) B1(-10.5,9.5) B2(-9.5,9.5) B3(-8.5,9.5) B4(-7.5,9.5) B5(-6.5,9.5) B6(-5.5,9.5) B7(-4.5,9.5) B8(-3.5,9.5) B9(-2.5,9.5) B10(-1.5,9.5) B11(-0.5,9.5) B12(0.5,9.5) B13(1.5,9.5) B14(2.5,9.5) B15(3.5,9.5) B16(4.5,9.5) B17(5.5,9.5) B18(6.5,9.5) B19(7.5,9.5) B20(8.5,9.5) B21(9.5,9.5) B22(10.5,9.5) C1(-10.5,8.5) C2(-9.5,8.5) C3(-8.5,8.5) C4(-7.5,8.5) C5(-6.5,8.5) C6(-5.5,8.5) C7(-4.5,8.5) C8(-3.5,8.5) C9(-2.5,8.5) C10(-1.5,8.5) C11(-0.5,8.5) C12(0.5,8.5) C13(1.5,8.5) C14(2.5,8.5) C15(3.5,8.5) C16(4.5,8.5) C17(5.5,8.5) C18(6.5,8.5) C19(7.5,8.5) C20(8.5,8.5) C21(9.5,8.5) C22(10.5,8.5) D1(-10.5,7.5) D2(-9.5,7.5) D3(-8.5,7.5) D4(-7.5,7.5) D5(-6.5,7.5) D6(-5.5,7.5) D7(-4.5,7.5) D8(-3.5,7.5) D9(-2.5,7.5) D10(-1.5,7.5) D11(-0.5,7.5) D12(0.5,7.5) D13(1.5,7.5) D14(2.5,7.5) D15(3.5,7.5) D16(4.5,7.5) D17(5.5,7.5) D18(6.5,7.5) D19(7.5,7.5) D20(8.5,7.5) D21(9.5,7.5) D22(10.5,7.5) E1(-10.5,6.5) E2(-9.5,6.5) E3(-8.5,6.5) E4(-7.5,6.5) E5(-6.5,6.5) E6(-5.5,6.5) E7(-4.5,6.5) E8(-3.5,6.5) E9(-2.5,6.5) E10(-1.5,6.5) E11(-0.5,6.5) E12(0.5,6.5) E13(1.5,6.5) E14(2.5,6.5) E15(3.5,6.5) E16(4.5,6.5) E17(5.5,6.5) E18(6.5,6.5) E19(7.5,6.5) E20(8.5,6.5) E21(9.5,6.5) E22(10.5,6.5) F1(-10.5,5.5) F2(-9.5,5.5) F3(-8.5,5.5) F4(-7.5,5.5) F5(-6.5,5.5) F6(-5.5,5.5) F7(-4.5,5.5) F8(-3.5,5.5) F9(-2.5,5.5) F10(-1.5,5.5) F11(-0.5,5.5) F12(0.5,5.5) F13(1.5,5.5) F14(2.5,5.5) F15(3.5,5.5) F16(4.5,5.5) F17(5.5,5.5) F18(6.5,5.5) F19(7.5,5.5) F20(8.5,5.5) F21(9.5,5.5) F22(10.5,5.5) G1(-10.5,4.5) G2(-9.5,4.5) G3(-8.5,4.5) G4(-7.5,4.5) G5(-6.5,4.5) G6(-5.5,4.5) G7(-4.5,4.5) G8(-3.5,4.5) G9(-2.5,4.5) G10(-1.5,4.5) G11(-0.5,4.5) G12(0.5,4.5) G13(1.5,4.5) G14(2.5,4.5) G15(3.5,4.5) G16(4.5,4.5) G17(5.5,4.5) G18(6.5,4.5) G19(7.5,4.5) G20(8.5,4.5) G21(9.5,4.5) G22(10.5,4.5) H1(-10.5,3.5) H2(-9.5,3.5) H3(-8.5,3.5) H4(-7.5,3.5) H5(-6.5,3.5) H6(-5.5,3.5) H7(-4.5,3.5) H8(-3.5,3.5) H9(-2.5,3.5) H10(-1.5,3.5) H11(-0.5,3.5) H12(0.5,3.5) H13(1.5,3.5) H14(2.5,3.5) H15(3.5,3.5) H16(4.5,3.5) H17(5.5,3.5) H18(6.5,3.5) H19(7.5,3.5) H20(8.5,3.5) H21(9.5,3.5) H22(10.5,3.5) J1(-10.5,2.5) J2(-9.5,2.5) J3(-8.5,2.5) J4(-7.5,2.5) J5(-6.5,2.5) J6(-5.5,2.5) J7(-4.5,2.5) J8(-3.5,2.5) J9(-2.5,2.5) J10(-1.5,2.5) J11(-0.5,2.5) J12(0.5,2.5) J13(1.5,2.5) J14(2.5,2.5) J15(3.5,2.5) J16(4.5,2.5) J17(5.5,2.5) J18(6.5,2.5) J19(7.5,2.5) J20(8.5,2.5) J21(9.5,2.5) J22(10.5,2.5) K1(-10.5,1.5) K2(-9.5,1.5) K3(-8.5,1.5) K4(-7.5,1.5) K5(-6.5,1.5) K6(-5.5,1.5) K7(-4.5,1.5) K8(-3.5,1.5) K9(-2.5,1.5) K10(-1.5,1.5) K11(-0.5,1.5) K12(0.5,1.5) K13(1.5,1.5) K14(2.5,1.5) K15(3.5,1.5) K16(4.5,1.5) K17(5.5,1.5) K18(6.5,1.5) K19(7.5,1.5) K20(8.5,1.5) K21(9.5,1.5) K22(10.5,1.5) L1(-10.5,0.5) L2(-9.5,0.5) L3(-8.5,0.5) L4(-7.5,0.5) L5(-6.5,0.5) L6(-5.5,0.5) L7(-4.5,0.5) L8(-3.5,0.5) L9(-2.5,0.5) L10(-1.5,0.5) L11(-0.5,0.5) L12(0.5,0.5) L13(1.5,0.5) L14(2.5,0.5) L15(3.5,0.5) L16(4.5,0.5) L17(5.5,0.5) L18(6.5,0.5) L19(7.5,0.5) L20(8.5,0.5) L21(9.5,0.5) L22(10.5,0.5) M1(-10.5,-0.5) M2(-9.5,-0.5) M3(-8.5,-0.5) M4(-7.5,-0.5) M5(-6.5,-0.5) M6(-5.5,-0.5) M7(-4.5,-0.5) M8(-3.5,-0.5) M9(-2.5,-0.5) M10(-1.5,-0.5) M11(-0.5,-0.5) M12(0.5,-0.5) M13(1.5,-0.5) M14(2.5,-0.5) M15(3.5,-0.5) M16(4.5,-0.5) M17(5.5,-0.5) M18(6.5,-0.5) M19(7.5,-0.5) M20(8.5,-0.5) M21(9.5,-0.5) M22(10.5,-0.5) N1(-10.5,-1.5) N2(-9.5,-1.5) N3(-8.5,-1.5) N4(-7.5,-1.5) N5(-6.5,-1.5) N6(-5.5,-1.5) N7(-4.5,-1.5) N8(-3.5,-1.5) N9(-2.5,-1.5) N10(-1.5,-1.5) N11(-0.5,-1.5) N12(0.5,-1.5) N13(1.5,-1.5) N14(2.5,-1.5) N15(3.5,-1.5) N16(4.5,-1.5) N17(5.5,-1.5) N18(6.5,-1.5) N19(7.5,-1.5) N20(8.5,-1.5) N21(9.5,-1.5) N22(10.5,-1.5) P1(-10.5,-2.5) P2(-9.5,-2.5) P3(-8.5,-2.5) P4(-7.5,-2.5) P5(-6.5,-2.5) P6(-5.5,-2.5) P7(-4.5,-2.5) P8(-3.5,-2.5) P9(-2.5,-2.5) P10(-1.5,-2.5) P11(-0.5,-2.5) P12(0.5,-2.5) P13(1.5,-2.5) P14(2.5,-2.5) P15(3.5,-2.5) P16(4.5,-2.5) P17(5.5,-2.5) P18(6.5,-2.5) P19(7.5,-2.5) P20(8.5,-2.5) P21(9.5,-2.5) P22(10.5,-2.5) R1(-10.5,-3.5) R2(-9.5,-3.5) R3(-8.5,-3.5) R4(-7.5,-3.5) R5(-6.5,-3.5) R6(-5.5,-3.5) R7(-4.5,-3.5) R8(-3.5,-3.5) R9(-2.5,-3.5) R10(-1.5,-3.5) R11(-0.5,-3.5) R12(0.5,-3.5) R13(1.5,-3.5) R14(2.5,-3.5) R15(3.5,-3.5) R16(4.5,-3.5) R17(5.5,-3.5) R18(6.5,-3.5) R19(7.5,-3.5) R20(8.5,-3.5) R21(9.5,-3.5) R22(10.5,-3.5) T1(-10.5,-4.5) T2(-9.5,-4.5) T3(-8.5,-4.5) T4(-7.5,-4.5) T5(-6.5,-4.5) T6(-5.5,-4.5) T7(-4.5,-4.5) T8(-3.5,-4.5) T9(-2.5,-4.5) T10(-1.5,-4.5) T11(-0.5,-4.5) T12(0.5,-4.5) T13(1.5,-4.5) T14(2.5,-4.5) T15(3.5,-4.5) T16(4.5,-4.5) T17(5.5,-4.5) T18(6.5,-4.5) T19(7.5,-4.5) T20(8.5,-4.5) T21(9.5,-4.5) T22(10.5,-4.5) U1(-10.5,-5.5) U2(-9.5,-5.5) U3(-8.5,-5.5) U4(-7.5,-5.5) U5(-6.5,-5.5) U6(-5.5,-5.5) U7(-4.5,-5.5) U8(-3.5,-5.5) U9(-2.5,-5.5) U10(-1.5,-5.5) U11(-0.5,-5.5) U12(0.5,-5.5) U13(1.5,-5.5) U14(2.5,-5.5) U15(3.5,-5.5) U16(4.5,-5.5) U17(5.5,-5.5) U18(6.5,-5.5) U19(7.5,-5.5) U20(8.5,-5.5) U21(9.5,-5.5) U22(10.5,-5.5) V1(-10.5,-6.5) V2(-9.5,-6.5) V3(-8.5,-6.5) V4(-7.5,-6.5) V5(-6.5,-6.5) V6(-5.5,-6.5) V7(-4.5,-6.5) V8(-3.5,-6.5) V9(-2.5,-6.5) V10(-1.5,-6.5) V11(-0.5,-6.5) V12(0.5,-6.5) V13(1.5,-6.5) V14(2.5,-6.5) V15(3.5,-6.5) V16(4.5,-6.5) V17(5.5,-6.5) V18(6.5,-6.5) V19(7.5,-6.5) V20(8.5,-6.5) V21(9.5,-6.5) V22(10.5,-6.5) W1(-10.5,-7.5) W2(-9.5,-7.5) W3(-8.5,-7.5) W4(-7.5,-7.5) W5(-6.5,-7.5) W6(-5.5,-7.5) W7(-4.5,-7.5) W8(-3.5,-7.5) W9(-2.5,-7.5) W10(-1.5,-7.5) W11(-0.5,-7.5) W12(0.5,-7.5) W13(1.5,-7.5) W14(2.5,-7.5) W15(3.5,-7.5) W16(4.5,-7.5) W17(5.5,-7.5) W18(6.5,-7.5) W19(7.5,-7.5) W20(8.5,-7.5) W21(9.5,-7.5) W22(10.5,-7.5) Y1(-10.5,-8.5) Y2(-9.5,-8.5) Y3(-8.5,-8.5) Y4(-7.5,-8.5) Y5(-6.5,-8.5) Y6(-5.5,-8.5) Y7(-4.5,-8.5) Y8(-3.5,-8.5) Y9(-2.5,-8.5) Y10(-1.5,-8.5) Y11(-0.5,-8.5) Y12(0.5,-8.5) Y13(1.5,-8.5) Y14(2.5,-8.5) Y15(3.5,-8.5) Y16(4.5,-8.5) Y17(5.5,-8.5) Y18(6.5,-8.5) Y19(7.5,-8.5) Y20(8.5,-8.5) Y21(9.5,-8.5) Y22(10.5,-8.5)
  silkscreen extent -12.27,-11.5 11.5,11.5, body extent -11.5,-11.5 11.5,11.5, height 3.5
FP-5015-MFG [mm]
  rect 3.43x1.78 smd paste+0 mask+0: 1(0,0)
  silkscreen extent -2.16,-1.34 2.17,1.34
FP-C0805C-DG-MFG [mm]
  rect 0.95x1.35 smd paste+0 mask+0: 1(-0.75,0) 2(0.75,0)
  silkscreen extent -1.11,-1.08 1.1,1.07, body extent -1.4,-0.85 1.4,0.85, height 0.25
FP-CC0402-MFG [mm]
  rect 0.5x0.5 smd paste+0 mask+0: 1(-0.5,0) 2(0.5,0)
  silkscreen extent -0.53,-0.68 0.53,0.67, body extent -0.87,-0.48 0.87,0.48, height 0.25
FP-GRM155-0_05-IPC_C [mm]
  rect 0.515x0.472 smd paste+0 mask+0: 1(-0.379,0) 2(0.379,0)
  silkscreen extent -0.64,-0.67 0.64,0.67, body extent -0.5,-0.25 0.5,0.25, height 0.55
FP-LQM21PH_G0-IPC_C [mm]
  rect 1.006x1.308 smd paste+0 mask+0: 1(-0.726,0) 2(0.726,0)
  silkscreen extent -1.23,-1.1 1.23,1.1, body extent -1.33,-0.8 1.33,0.8, height 0.25
HDR1X5 [mm] "Connector; Header; 5 Position"
  rect 1.5x1.5 hole 0.9: 1(0,0)
  round 1.5 hole 0.9: 2(2.54,0) 3(5.08,0) 4(7.62,0) 5(10.16,0)
  silkscreen extent -1.27,-1.27 11.43,1.27
HDR2X10 [mm] "Connector; Header; 10x2 Position"
  rect 1.5x1.5 hole 0.9: 1(0,0)
  round 1.5 hole 0.9: 2(0,2.54) 3(2.54,0) 4(2.54,2.54) 5(5.08,0) 6(5.08,2.54) 7(7.62,0) 8(7.62,2.54) 9(10.16,0) 10(10.16,2.54) 11(12.7,0) 12(12.7,2.54) 13(15.24,0) 14(15.24,2.54) 15(17.78,0) 16(17.78,2.54) 17(20.32,0) 18(20.32,2.54) 19(22.86,0) 20(22.86,2.54)
  silkscreen extent -1.27,-1.27 24.13,3.81
HDR2X20 [mm] "Connector; Header; 20x2 Position"
  rect 1.5x1.5 hole 0.9: 1(0,0)
  round 1.5 hole 0.9: 2(0,2.54) 3(2.54,0) 4(2.54,2.54) 5(5.08,0) 6(5.08,2.54) 7(7.62,0) 8(7.62,2.54) 9(10.16,0) 10(10.16,2.54) 11(12.7,0) 12(12.7,2.54) 13(15.24,0) 14(15.24,2.54) 15(17.78,0) 16(17.78,2.54) 17(20.32,0) 18(20.32,2.54) 19(22.86,0) 20(22.86,2.54) 21(25.4,0) 22(25.4,2.54) 23(27.94,0) 24(27.94,2.54) 25(30.48,0) 26(30.48,2.54) 27(33.02,0) 28(33.02,2.54) 29(35.56,0) 30(35.56,2.54) 31(38.1,0) 32(38.1,2.54) 33(40.64,0) 34(40.64,2.54) 35(43.18,0) 36(43.18,2.54) 37(45.72,0) 38(45.72,2.54) 39(48.26,0) 40(48.26,2.54)
  silkscreen extent -1.27,-1.27 49.53,3.81
LEDC3015X190N [mm]
  rect 1.35x1.7 smd: 1(-1.3,0) 2(1.3,0)
  silkscreen extent -2.32,-1.2 1.3,1.2
LEDM168X65N [mm]
  rect 1x0.7 smd: 1(-0.9,0) 2(0.9,0)
  silkscreen extent -1.25,-0.4 0.8,0.4
LT-MS8-8_N [mm] "SOP, 8-Leads, Body 3x3mm, Pitch 0.65mm, IPC Medium Density"
  oval 1.6x0.45 smd: 1(-2.15,0.975) 2(-2.15,0.325) 3(-2.15,-0.325) 4(-2.15,-0.975) 5(2.15,-0.975) 6(2.15,-0.325) 7(2.15,0.325) 8(2.15,0.975)
  silkscreen extent -2.27,-1.55 0.95,1.87, body extent -1.55,-1.55 1.55,1.55, height 1.1
ONSC-SOD-523-2-502-01_V [mm] "SOD, 2-Leads, Body 1.2x0.8mm"
  rect 0.48x0.4 smd: 1(-0.66,0) 2(0.66,0)
  silkscreen extent -0.75,-0.4 0.07,0.65, body extent -0.6,-0.4 0.6,0.4, height 0.7
OSC_ECS-2033-320-AU [mm]
  rect 1.1x0.9 smd: 1(-0.9,-0.7) 2(0.9,-0.7) 3(0.9,0.7) 4(-0.9,0.7)
  silkscreen extent -2.08,-0.8 -1.88,-0.6
PTH-M2D5X5 [mm]
  round 5 hole 2.5: 1(0,0)
RESC1005X40X25LL05T10 [mm] "Chip Resistor, 2-Leads, Body 1.00x0.50mm, IPC High Density"
  rect 0.5x0.45 smd: 1(-0.375,0) 2(0.375,0)
  body extent -0.53,-0.27 0.53,0.28, height 0.4
RESC1005X40X25ML05T10 [mm] "Chip Resistor, 2-Leads, Body 1.00x0.50mm, IPC Low Density"
  rect 0.7x0.65 smd: 1(-0.475,0) 2(0.475,0)
  body extent -0.53,-0.27 0.53,0.28, height 0.4
RESC1608X50N [mm]
  rect 0.85x1 smd: 1(-0.75,0) 2(0.75,0)
  body extent -0.79,-0.43 0.79,0.43, height 0.5
RESC1609X50X30NL8T20 [mm] "Chip Resistor, 2-Leads, Body 1.65x0.95mm, IPC Medium Density"
  rect 0.8x0.95 smd: 1(-0.65,0) 2(0.65,0)
  body extent -0.82,-0.48 0.82,0.48, height 0.5
RESC2012X60N [mm]
  rect 0.95x1.45 smd: 1(-1,0) 2(1,0)
  silkscreen extent 0,-0.53 0,0.53, body extent -1,-0.63 1,0.63, height 0.6
RESC3116X65N#1 [mm]
  rect 1.1x1.75 smd: 1(-1.4,0) 2(1.4,0)
  silkscreen extent 0,-0.7 0,0.7, body extent -1.55,-0.8 1.55,0.8, height 0.65
RESC3116X65N#2 [mm]
  rect 1x1.75 smd: 1(-1.5,0) 2(1.5,0)
  silkscreen extent 0,-0.7 0,0.7, body extent -1.55,-0.8 1.55,0.8, height 0.65
SMD-0805 [mm] "Chip Inductor, 2-Leads, Body 2.0x1.2mm"
  rect 1.15x1 smd: 1(-1.175,0) 2(1.175,0)
  body extent -1,-0.6 1,0.6, height 0.89
SMTC-ESQ-126-23-X-D [mm] "Elevated Socket, 2x26 Pins, Vertical, 2.54mm Pitch, Female"
  rect 1.55x1.55 hole 1.02: 1(0,0)
  round 1.55 hole 1.02: 2(0,-2.54) 3(2.54,0) 4(2.54,-2.54) 5(5.08,0) 6(5.08,-2.54) 7(7.62,0) 8(7.62,-2.54) 9(10.16,0) 10(10.16,-2.54) 11(12.7,0) 12(12.7,-2.54) 13(15.24,0) 14(15.24,-2.54) 15(17.78,0) 16(17.78,-2.54) 17(20.32,0) 18(20.32,-2.54) 19(22.86,0) 20(22.86,-2.54) 21(25.4,0) 22(25.4,-2.54) 23(27.94,0) 24(27.94,-2.54) 25(30.48,0) 26(30.48,-2.54) 27(33.02,0) 28(33.02,-2.54) 29(35.56,0) 30(35.56,-2.54) 31(38.1,0) 32(38.1,-2.54) 33(40.64,0) 34(40.64,-2.54) 35(43.18,0) 36(43.18,-2.54) 37(45.72,0) 38(45.72,-2.54) 39(48.26,0) 40(48.26,-2.54) 41(50.8,0) 42(50.8,-2.54) 43(53.34,0) 44(53.34,-2.54) 45(55.88,0) 46(55.88,-2.54) 47(58.42,0) 48(58.42,-2.54) 49(60.96,0) 50(60.96,-2.54) 51(63.5,0) 52(63.5,-2.54)
  silkscreen extent -1.53,-3.74 65.03,1.2, body extent -1.53,-3.81 65.02,1.27, height 13.59
SOIC-SO28_L [mm] "SOIC, 28-Leads, Body 17.9x7.5mm, Pitch 1.27mm, IPC High Density"
  oval 2x0.6 smd: 1(-4.5,8.255) 2(-4.5,6.985) 3(-4.5,5.715) 4(-4.5,4.445) 5(-4.5,3.175) 6(-4.5,1.905) 7(-4.5,0.635) 8(-4.5,-0.635) 9(-4.5,-1.905) 10(-4.5,-3.175) 11(-4.5,-4.445) 12(-4.5,-5.715) 13(-4.5,-6.985) 14(-4.5,-8.255) 15(4.5,-8.255) 16(4.5,-6.985) 17(4.5,-5.715) 18(4.5,-4.445) 19(4.5,-3.175) 20(4.5,-1.905) 21(4.5,-0.635) 22(4.5,0.635) 23(4.5,1.905) 24(4.5,3.175) 25(4.5,4.445) 26(4.5,5.715) 27(4.5,6.985) 28(4.5,8.255)
  silkscreen extent -4.62,-9.05 3.1,9.23, body extent -3.8,-9.05 3.8,9.05, height 2.65
SON127P800X600X80-9N-D [mm]
  rect 0.95x0.45 smd: 1(-3.9,1.905) 2(-3.9,0.635) 3(-3.9,-0.635) 4(-3.9,-1.905) 5(3.9,-1.905) 6(3.9,-0.635) 7(3.9,0.635) 8(3.9,1.905)
  rect 3.5x4.4 smd: 9(0,0)
  silkscreen extent -4.5,2.51 -4.25,2.76, body extent -4.05,-3 4.05,3, height 0.8

## Part data
C1 C2 C4 C5 C7 C9 C10 C12 C13 C14 C15: library part CMP-2008-02046-1, Manufacturer=Kemet, Part Number=C0402C104K8PACTU
C3: library part CMP-03422-001340-1, "CAP CER 0.33UF 10V X5R 0402", Capacitance="330 nF", Manufacturer=YAGEO, Package=CC0402, Temperature="-55°C to +125°C", Temperature Characteristic=X5R, Temperature Coefficient=30ppm/°C, Temperature Range High=+125°C, Temperature Range Low=-55°C, Tolerance=0.1, Voltage Rating="10 V", Automotive=No, Automotive Grade=NA, Category=Cap, ComponentLink2Description=Datasheet, ComponentLink2URL=http://www.yageo.com/documents/recent/UPY-GP_NP0_16V-to-50V_16.pdf, Device Class L1="Passive Components", Device Class L2=Capacitors, Device Class L3="Ceramic Capacitors", Digikey Description="CAP CER 0.33UF 10V X5R 0402", Footprint Url=http://www.yageo.com/exep/pages/download/literatures/UPY-C_GEN_24.pdf, Height=0.55mm, Ipc Land Pattern Name=CAPC10050X50, Lead Free=Yes, Manufacturer Part Number=CC0402KRX5R6BB334, Material=Ceramic, Mouser Description="0402 330 nF 10 V ±10 % Tolerance X5R SMT Multilayer Ceramic Capacitor", Octopart=https://octopart.com/cc0402krx5r6bb334-yageo-21548561, RoHS=TRUE
C6: library part CMP-1034-01878-1, "CAP 10nF 16V -20% to +80% 0402 (1005 Metric) Thickness 0.6mm SMD", Case-EIA=0402, Case-Metric=1005, Rated Voltage="16 V", Tolerance="-20% to +80%", Max Thickness="0.6 mm", Technology=SMT
C8: library part CMP-2000-05452-1, "Multilayer Ceramic Chip Capacitor, 10 uF, +/- 10%, 10 V, -55 to 125 degC, 0805 (2012 Metric), RoHS, Tape and Reel", Capacitance=10µF, Manufacturer=TDK, Operating Temperature=-55degC~125degC, Package / Case=0805(2012Metric), Package Description="2-Pin Surface Mount Device, Body 2 x 1.25 mm", Package Reference=805, PCN Part Number=MLCCPartNumberChange30/Nov/2012, Ratings=-, Standard Package=1, Temperature Coefficient=X7R, Tolerance=±10%, Voltage - Rated=10V, Applications=GeneralPurpose, Category=Capacitors, Datasheet URL=http://download.siliconexpert.com/pdfs/2015/4/21/15/54/45/779/tdk_/manual/37024850441143360mlcc_commercial_general_en.pdf, Datasheet Version=Mar-15, Family=CeramicCapacitors, Features=-, Height - Seated (Max)=-, Lead Spacing=-, Lead Style=-, Manufacturer URL=http://www.tdk.com/, Mounting Type=SurfaceMount,MLCC, Online Catalog=CSeries,GeneralPurpose, Other Names=445-6857-6, Packaging=Digi-Reel, Product Training Modules=CSeriesGeneralApplicationsSEAT,CCV,andTVCLDesignToolsGuidetoReplacinganElectrolyticCapacitorwithanMLCC, RoHS Information=RoHSCertificate-MLCC, Series=C, Size / Dimension="0.079\"Lx0.049\"W(2.00mmx1.25mm)", Thickness (Max)="0.057\"(1.45mm)"
C16 C18 C20 C22 C24 C26 C28 C29 C30 C32 C34 C36 C38 C40 C42 C43 C44 C46 C49 C51 C55 C57 C62 C64 C66 C68 C70 C73 C75 C78 C79 C81 C83 C86 C88: library part CMP-2008-04637-5, "Chip Multilayer Ceramic Capacitors for General Purpose, 0402, 10000pF, X7R, 15%, 10%, 50V GRM155R71H103KA88D", Case Code (Imperial)=0402, Case Code (Metric)=1005, Dielectric=X7R, Max Operating Temperature=125°C, Min Operating Temperature=-55°C, Package Quantity=1, Tolerance=10%, Voltage=25V, Voltage Rating=50V, Capacitance=10nF, Case/Package=0402, Depth=0.5mm, Height=0.5mm, Lead Free="Lead Free", Length=1mm, Material=Ceramic, Mount="Surface Mount", Number of Pins=2, Packaging="Tape and Reel", Radiation Hardening=No, REACH SVHC="No SVHC", Termination=SMD/SMT, Thickness=0.022inch, Voltage Rating (DC)=50V, Width=0.02inch
C17 C19 C21 C23 C25 C27 C31 C33 C35 C37 C39 C41 C45 C47 C50 C52 C54 C56 C59 C63 C65 C69 C71 C74 C76 C80 C82 C87 C89: library part CMP-2008-04637-5, "Chip Multilayer Ceramic Capacitors for General Purpose, 0402, 10000pF, X7R, 15%, 10%, 50V GRM155R71H103KA88D", Capacitance=10nF, Case Code (Imperial)=0402, Case Code (Metric)=1005, Dielectric=X7R, Max Operating Temperature=125°C, Min Operating Temperature=-55°C, Package Quantity=1, Tolerance=10%, Voltage=25V, Voltage Rating=50V, Case/Package=0402, Depth=0.5mm, Height=0.5mm, Lead Free="Lead Free", Length=1mm, Material=Ceramic, Mount="Surface Mount", Number of Pins=2, Packaging="Tape and Reel", Radiation Hardening=No, REACH SVHC="No SVHC", Termination=SMD/SMT, Thickness=0.022inch, Voltage Rating (DC)=50V, Width=0.02inch
C48 C53 C67 C77: library part CMP-2000-06025-1, "Chip Capacitor, 1 uF, +/- 10%, 50 V, -55 to 85 degC, 0603 (1608 Metric), RoHS, Tape and Reel", Capacitance=1µF, Manufacturer=TDK, Operating Temperature=-55°C~85°C, Package / Case=0603(1608Metric), Package Description="2-Pin Surface Mount Device, Body 1.6 x 0.8 mm", Package Reference=0603, PCN Part Number=MLCCPartNumberChange30/Nov/2012, Ratings=-, Standard Package=1, Temperature Coefficient=X5R, Tolerance=±10%, Voltage - Rated=50V, Applications=GeneralPurpose, Category=Capacitors, Datasheet URL=https://product.tdk.com/info/en/catalog/datasheets/mlcc_commercial_general_en.pdf, Datasheet Version=08/2016, Design Resources=20WNon-IsolatedBuckLEDDriverUsingPLLNK460KG, Family=CeramicCapacitors, Features=-, Height - Seated (Max)=-, Lead Spacing=-, Lead Style=-, Manufacturer URL=http://www.tdk.com/, Mounting Technology=SurfaceMount, Mounting Type=SurfaceMount,MLCC, Online Catalog=CSeries,GeneralPurpose, Other Names=445-7468-6, Packaging=Digi-Reel®, Product Training Modules=CSeriesGeneralApplicationsSEAT,CCV,andTVCLDesignToolsGuidetoReplacinganElectrolyticCapacitorwithanMLCC, RoHS Information=RoHSCertificate-MLCC, Series=C, Size / Dimension="0.063\"Lx0.031\"W(1.60mmx0.80mm)", Thickness (Max)="0.035\"(0.90mm)"
C58: library part CMP-001-00081-2, "Chip Capacitor, 22µF +/-40%, 16V, 0805, Thickness 1.45 mm", Case/Package=0402, Max Operating Temperature=85°C, Min Operating Temperature=-55°C, Tolerance=5%, Voltage Rating=16V, Mounting Technology=SMT, Pins=2
C100: library part CMP-1038-02151-2, "CAP 4.7uF 25V ±10% 1210 (3225 Metric) Thickness 2.2mm SMD", Case-EIA=1210, Case-Metric=3225, Rated Voltage="25 V", Tolerance=Â±10%, Max Thickness="2.2 mm", Technology=SMT
C101: library part CMP-2007-03243-2, "CAP CER 10UF 10V X5R 0805", 3DS Part Number=220-00001, Capacitance=10uF, Manufacturer=Kemet, Package=C0805C-DG, Temperature="-55°C to +85°C", Temperature Characteristic=X5R, Temperature Coefficient=15%, Temperature Range High=+85°C, Temperature Range Low=-55°C, Tolerance=10%, Voltage=10V, Automotive=No, Category=Cap, ComponentLink2Description=Datasheet, ComponentLink2URL=https://content.kemet.com/datasheets/KEM_C1006_X5R_SMD.pdf, Device Class L1="Passive Components", Device Class L2=Capacitors, Device Class L3="Ceramic Capacitors", Digikey Description="CAP CER 10UF 10V X5R 0805", Height=1.4mm, Ipc Land Pattern Name=CAPC200125X125, Lead Free=Yes, Manufacturer Part Number=C0805C106K8PACTU, Material=Ceramic, Mouser Description="CAP CER 10UF 10V X5R 0805", Octopart=https://octopart.com/c0805c106k8pactu-kemet-98697, RoHS=TRUE, Voltage Rating=10V
COM_Header: "Header, 10-Pin, Dual row", LatestRevisionDate=17-Jul-2002, LatestRevisionNote="Re-released for DXP Platform.", Publisher="Altium Limited"
D1 D2: library part CMP-1063-00100-1, "Transient Voltage Suppressor, Micro-Packaged Diode for ESD Protection, 2-Pin SOD-523, Pb-Free, Tape and Reel", Manufacturer="On Semiconductor", PartNumber=ESD5Z7.0T1G, ComponentLink1Description="Manufacturer URL", ComponentLink1URL=http://www.onsemi.com/, ComponentLink2Description=Datasheet, ComponentLink2URL=http://www.onsemi.cn/pub_link/Collateral/ESD5Z2.5T1-D.PDF, ComponentLink3Description="Package Specification", ComponentLink3URL=http://www.onsemi.com/pub_link/Collateral/502-01.PDF, DatasheetVersion="Rev. 10", Direction=Unidirectional, IR Max (uA)=0.01, Mounting Technology="Surface Mount", Number of Lines=1, PackageDescription="2-Pin SOD, Body 1.2 x 0.8 mm", PackageReference=SOD-523-2-502-01, PackageVersion="Rev. E, 09/2010", Packing="Tape and Reel", PPK Max (W)=200, RoHS=Pb-Free, V(BR) Min (V)=7.5, VRWM Max (V)=7
FLASH1: "Capacitor Polarised", Manufacturer_Name="Kioxia America", Mouser Part Number=757-TC58CVG0S3HRAIJ, Datasheet Link=https://business.kioxia.com/en-us/memory/detail.TC58CVG0S3HRAIJ.html, Height=0.8mm, Manufacturer_Part_Number=TC58CVG0S3HRAIJ, Mouser Price/Stock=https://www.mouser.co.uk/ProductDetail/Kioxia-America/TC58CVG0S3HRAIJ?qs=OlC7AqGiEDnRG%2Fk7X5l76A%3D%3D
FRAM1: "Integrated Circuit", Manufacturer_Name="Cypress Semiconductor", Mouser Part Number=877-FM22LD16-55-BG, Arrow Part Number=FM22LD16-55-BG, Arrow Price/Stock=https://www.arrow.com/en/products/fm22ld16-55-bg/cypress-semiconductor, Datasheet Link=https://datasheet.datasheetarchive.com/originals/dk/DKDS-12/237922.pdf, Height=1.2mm, Manufacturer_Part_Number=FM22LD16-55-BG, Mouser Price/Stock=https://www.mouser.com/Search/Refine.aspx?Keyword=877-FM22LD16-55-BG
J1 J2: library part CMP-1026-00047-1, "PC/104(TM) Elevated Socket Strip, Through-hole, Vertical, -55 to 105 degC, 2.54 mm Pitch, 52-Pin, Female, RoHS", Manufacturer=Samtec, Temperature Range="-55 to 105 degC", ComponentLink1Description="Manufacturer URL", ComponentLink1URL=http://www.samtec.com, ComponentLink2Description=Datasheet, ComponentLink2URL=http://www.samtec.com/documents/webfiles/pdf/ESQ_TH.PDF, ComponentLink3Description="Package Specification", ComponentLink3URL=http://www.samtec.com/documents/webfiles/cpdf/ESQ-1XX-XX-X-X-XXX-XX-X-XX-MKT.pdf, DatasheetVersion=F-214, Mounting Technology=Through-hole, Orientation=Vertical, PackageDescription="ESQ Strip ASM", PackageReference=ESQ-126-23-X-D, PackageVersion="BZ, 9/1998", PartNumber=ESQ-126-23-T-D, Pitch="2.54 mm", RoHS=True
J3: library part CMP-1502-01082-1, "THT Vertical Pin Header WR-PHD, Pitch 2.54 mm, Single Row, 10 pins", Contact Resistance=20mOhm, Manufacturer="Wurth Elektronik", Operating Temperature=-40to105degC, Rated Current=3A, Withstanding Voltage=500VAC, Working Voltage=250VAC, Datasheet URL=https://katalog.we-online.de/em/datasheet/6130xx11121.pdf, Gender=Male, Manufacturer URL=http://www.we-online.de, Mounting Technology=THT, Orientation=Vertical, Package Reference=61301011121, Packaging=Bag, Part Number=61301011121, Pin Number=10, Pitch=2.54mm, Publisher=WurthElektronik, Row Number=Single
J_ICSP1: library part PinHeader1x5, "Plug connector"
L2: library part CMP-0221-00012-1, "SMD-Multilayer Inductor WE-MI, L = 1.00 µH", Inductance="1.00 ÂµH", ComponentLink1Description="Manufacturer Link", ComponentLink1URL=http://www.we-online.com, ComponentLink2Description=Datasheet, ComponentLink2URL=http://www.we-online.de/katalog/media/pdf/7447905.pdf, DatasheetVersion="ver 4, Oct-2004", PackageDescription="Chip Inductor, 2-Leads, Body 2.0 x 1.2 mm", PackageReference=SMD-0805, PackageVersion=2005
L3: library part CMP-06042-016317-1, "Multilayer Type Inductor for Power Lines, 0805 (2012), 2.2μH, 30%, 0.288Ω, 0.8A", Case Code (Imperial)=0805, Case Code (Metric)=2012, Current Rating=800mA, DC Resistance (DCR)=288mR, Inductance=2.2uH, Inductance Tolerance=30%, Max Operating Temperature=125°C, Min Operating Temperature=-55°C, Package Quantity=4000, Self Resonant Frequency=40MHz, Test Frequency=1MHz, Case/Package=0805, Core Material=Ferrite, DC Current=800mA, Depth=1.4mm, Height=0.9mm, Height - Seated (Max)=0.039inch, Lead Free="Lead Free", Length=2mm, Max DC Current=800mA, Military Standard=Not, Mount="Surface Mount", Packaging="Tape and Reel", Radiation Hardening=No, REACH SVHC="No SVHC", RoHS Compliant=Yes, Series=LQM, Shielding=Shielded, Termination=SMD/SMT, Tolerance=30%, Width=0.049inch
LED1 LED2: "LED", Manufacturer_Name="Stanley Electric", Mouser2 Part Number=327-RPG1102W660TR, Height=1.9mm, Manufacturer_Part_Number=RPG1102W-660-TR, Mouser2 Price/Stock=https://www.mouser.com/Search/Refine.aspx?Keyword=327-RPG1102W660TR
LED_FPGA_1 LED_FPGA_2 LED_FPGA_3: "LED", Manufacturer_Name="ROHM Semiconductor", Datasheet Link=https://www.rohm.com/datasheet/SMLD12BN1W/smld12-e, Height=0.65mm, Manufacturer_Part_Number=SMLD12BN1WT86
P_GPIO: "Header, 20-Pin, Dual row", LatestRevisionDate=17-Jul-2002, LatestRevisionNote="Re-released for DXP Platform.", Publisher="Altium Limited"
PIC1: library part CMP-0116-01078-1, "Enhanced Flash Microcontroller with 10-Bit A/D and nanoWatt Technology, 32K Flash, 28-Pin SOIC, Industrial Temperature Range", Code_JEDEC=MS-013, DatasheetVersion="revE, Oct-2008", PackageDescription="28-Lead Plastic Small Outline (SO) - Wide 7.50mm Body [SOIC]", PackageReference=SOIC-SO28, PackageVersion="revBB, Aug-2009"
R1 R6 R7 R8 R9 R10 R11: library part CMP-2002-07353-1, Manufacturer="Yageo / Phycomp", Part Number=RC0402FR-0710KL
R2: library part CMP-2002-07511-1, Manufacturer="Yageo / Phycomp", Part Number=RC0402FR-07220RL
R14 R15 R16 R17: library part CMP-2000-03816-5, "Chip Resistor, 0 Ohm, Jumper, 100 mW, -55 to 155 degC, 0603 (1608 Metric), RoHS, Tape and Reel", Manufacturer="Vishay Semiconductor", Max Operating Temperature="155 degC", Min Operating Temperature="-55 degC", Package Quantity=5000, Voltage Rating="75 V", ComponentLink1Description="Manufacturer URL", ComponentLink1URL=http://www.vishay.com/, ComponentLink2Description=Datasheet, ComponentLink2URL=http://www.vishay.com/docs/20035/dcrcwe3.pdf, DatasheetVersion=06/2012, Height="0.45 mm", Length="1.55 mm", Mount="Surface Mount", Mounting Technology="Surface Mount", PackageDescription="2-Pin Surface Mount Device, Body 1.575 x 0.85 mm", PackageReference=0603, Packaging="Tape and Reel", Pins=2, REACH SVHC=Unknown, RoHSCompliant=true
R18 R19 R20 R21 R22 R23: "Resistor", Manufacturer_Name=Bourns, Datasheet Link=https://www.mouser.be/datasheet/2/54/chp-a-1858677.pdf, Height=0.65mm, Manufacturer_Part_Number=CHP1206AFX-4701ELF
R100: "Resistor", Manufacturer_Name="YAGEO (PHYCOMP)", Datasheet Link=https://www.sos.sk/productdata/35/10/4/35104/RC1206.pdf, Height=0.65mm, Manufacturer_Part_Number=RC1206JR-07180RL
R101: "Resistor", Manufacturer_Name="KOA Speer", Datasheet Link=https://www.mouser.de/datasheet/2/219/RN73H-1843478.pdf, Height=0.6mm, Manufacturer_Part_Number=RN73H2ATTD75R0B25
R_LED3_80Ohm R_LED4_80Ohm R_LED5_80Ohm: "Resistor", Manufacturer_Name=Vishay, Mouser2 Part Number=71-RCS060382R0FKEA, Datasheet Link=https://componentsearchengine.com//RCS060382R0FKEA.pdf, Height=0.5mm, Manufacturer_Part_Number=RCS060382R0FKEA, Mouser2 Price/Stock=https://www.mouser.com/Search/Refine.aspx?Keyword=71-RCS060382R0FKEA
SRAM1: "Integrated Circuit", Manufacturer_Name="Cypress Semiconductor", Mouser Part Number=727-CY62167GE30BV1XI, Arrow Part Number=CY62167GE30-45BV1XI, Arrow Price/Stock=https://www.arrow.com/en/products/cy62167ge30-45bv1xi/cypress-semiconductor, Datasheet Link=https://datasheet.datasheetarchive.com/originals/dk/DKDS-12/238198.pdf, Height=1mm, Manufacturer_Part_Number=CY62167GE30-45BV1XI, Mouser Price/Stock=https://www.mouser.co.uk/ProductDetail/Cypress-Semiconductor/CY62167GE30-45BV1XI/?qs=3FnuM6ZipRIEqfAGSsiEJg%3D%3D
ST1 ST2 ST3 ST4: library part CMP-00028-00004-1, "M2 PTH (2.5mm), 5mm pad", Pins=1
T1 T2 T3 T4 T5 T6 T7: library part CMP-2000-05183-2, "PC TEST POINT MINIATURE", Manufacturer=keystone, Automotive=No, Category=Conn, ComponentLink2Description=Datasheet, ComponentLink2URL=http://www.keyelco.com/product-pdf.cfm?p=1353, Conn Orientation=Straight, Contact Material=Silver, Device Class L1=Connectors, Device Class L2=unset, Device Class L3=unset, Digikey Description="PC TEST POINT MINIATURE", Height=1.65mm, Lead Free=Yes, Manufacturer Part Number=5015, Number Of Contacts=1, Octopart=https://octopart.com/5015-keystone-3822, Package=5015, RoHS=TRUE
U1: library part CMP-0097-00007-1, "M1-Ready ProASIC3 Flash Family FPGA, 235 User IOs, 600K System Gates, 108 Kbits RAM, 1 Kbit Flash ROM, 1 PLL, 484-Ball FBGA, Commercial Grade", Code_IPC=BGA100P22X22-484, Code_JEDEC=MS-034-AAJ-1, DatasheetVersion="v1.3, Oct-2009", PackageDescription="484-Ball Fine Pitch Plastic Ball Grid Array (FG484) - Fully Populated", PackageReference=FG484, PackageVersion="ver11.2, Nov-2009"
U2: library part CMP-0359-00634-2, "Single Channel, Precision, Rail-to-Rail Input Current Sense Amplifier, 0.1 MHz Typical GBW, 2.85 to 36 V, 8-Pin SOP (MS8-8), Industrial, Pb-Free", Linear Technology Part Number=LT6105, Manufacturer="Linear Technology", Channels (#)=1, ComponentLink1Description="Manufacturer URL", ComponentLink1URL=http://www.linear.com/, ComponentLink2Description=Datasheet, ComponentLink2URL=http://cds.linear.com/docs/en/datasheet/6105fa.pdf, ComponentLink3Description="Package Specification", ComponentLink3URL=http://cds.linear.com/docs/en/packaging/05081610_G_SO8.pdf, DatasheetVersion="Rev. A", GBW (MHz) Typical=0.1, Is (mA) Typical=0.2, Mounting Technology="Surface Mount", PackageDescription="8-Lead Plastic Small Outline, Body 3.9 x 4.9 mm, Pitch 1.27 mm", PackageReference=LT-MS8-8, PackageVersion="Rev G", PartNumber=LT6105IMS8#PBF, RevisionNote="URLs updated", RoHS=Pb-Free, Type=CSA, Vos (mV) Guaranteed=0.3, Vos (mV) Typical=0.1, Vs Max (V)=36, Vs Min (V)=2.85
U5: library part CMP-0063-01132-3, "2MHz, 600mA Step-Down DC-DC Converter, 5-pin SOT-23, Pb-Free", Manufacturer="Texas Instruments", PackageTopMarking=SJEB*XTT, PowerWise=Y, ComponentLink1Description="Datasheet URL", ComponentLink1URL=http://www.ti.com/general/docs/lit/getliterature.tsp?genericPartNumber=LM3671&fileType=pdf, CompType=MiscPower, PackageDescription="Molded SOT-23, .115 x .063 x .040 in Body, 5 Lead, .0375 in Pitch", PackageReference=DBV0005A, PinCount=5, RoHS=Y
X1: library part CMP-1698-00006-1, "Male Header, Pitch 2.54 mm, 1 x 5 Position, Height 16.24 mm, Tail Length 3.05 mm,  / -65 to 125 degC, RoHS, Tape and Reel", Current Rating="1 A", Max Operating Temperature=85degC, Min Operating Temperature=-25degC, Package Quantity=500, ComponentLink1Description="Manufacturer URL", ComponentLink1URL=http://portal.fciconnect.com/, ComponentLink2Description=Datasheet, ComponentLink2URL=http://portal.fciconnect.com/Comergent//fci/drawing/77311.pdf, Contact Material=Brass, DatasheetVersion="Rev. CK, 07/2016", Gender=Female, PackageDescription="Male Header, Pitch 2.54 mm, 1 x 5 Position, Height 16.24 mm, Tail Length 3.05 mm", PackageReference=77311-5, Packaging="Tape and Reel", RoHSCompliant=True, Shielding=Shielded
X2: "Osc Xo 32.000mhz Cmos Smd", Package="SMD-4 ECS International", Digi-Key_Part_Number=XC1864CT-ND, MF="ECS International", MP=ECS-2033-320-AU, SnapEDA_Link=https://www.snapeda.com/parts/ECS-2033-320-AU/ECS%20International/view-part/2456319/?ref=snap

## Via types
v1: diameter 0.35, hole 0.25, Top Layer to Bottom Layer, tented bottom, 572 vias

## Nets (pads, with @x,y where several pads share a name; then routed paths per layer and width w, separated by ;. In a path a pad name is that pad's centre, name@x,y a point inside that pad or via, vN(x,y) a via of type N, cw(c..) or ccw(c..) an arc to the next point about the centre after c; other vN are vias at no path point)
+1.5V: C16.1 C17.1 C18.1 C19.1 C20.1 C21.1 C22.1 C23.1 C24.1 C25.1 C26.1 C27.1 C28.1 C29.1 C30.1 C31.1 C32.1 C33.1 C34.1 C35.1 C36.1 C37.1 C38.1 C39.1 C40.1 C41.1 C42.1 C43.1 C101.1 L3.2 T3.1 U1.C8 U1.C9 U1.C14 U1.C15 U1.H3 U1.H20 U1.J10 U1.J11 U1.J12 U1.J13 U1.K9 U1.K14 U1.L9 U1.L14 U1.M9 U1.M14 U1.N9 U1.N14 U1.P10 U1.P11 U1.P12 U1.P13 U1.R3 U1.R20 U1.Y8 U1.Y9 U1.Y14 U1.Y15 U5.4 | length 40.5